# Altium PCB POT 2x8.PcbDoc
Units mm, origin at the board's own origin, x right, y up, seen from the top; angles counter-clockwise.
Board outline 81.6 x 56 mm, 4 copper layers (Top Layer, Mid Layer 1, Mid Layer 2, Bottom Layer), stack 0.97 mm thick; 87 components, 86 nets, 387 pads, 283 vias.
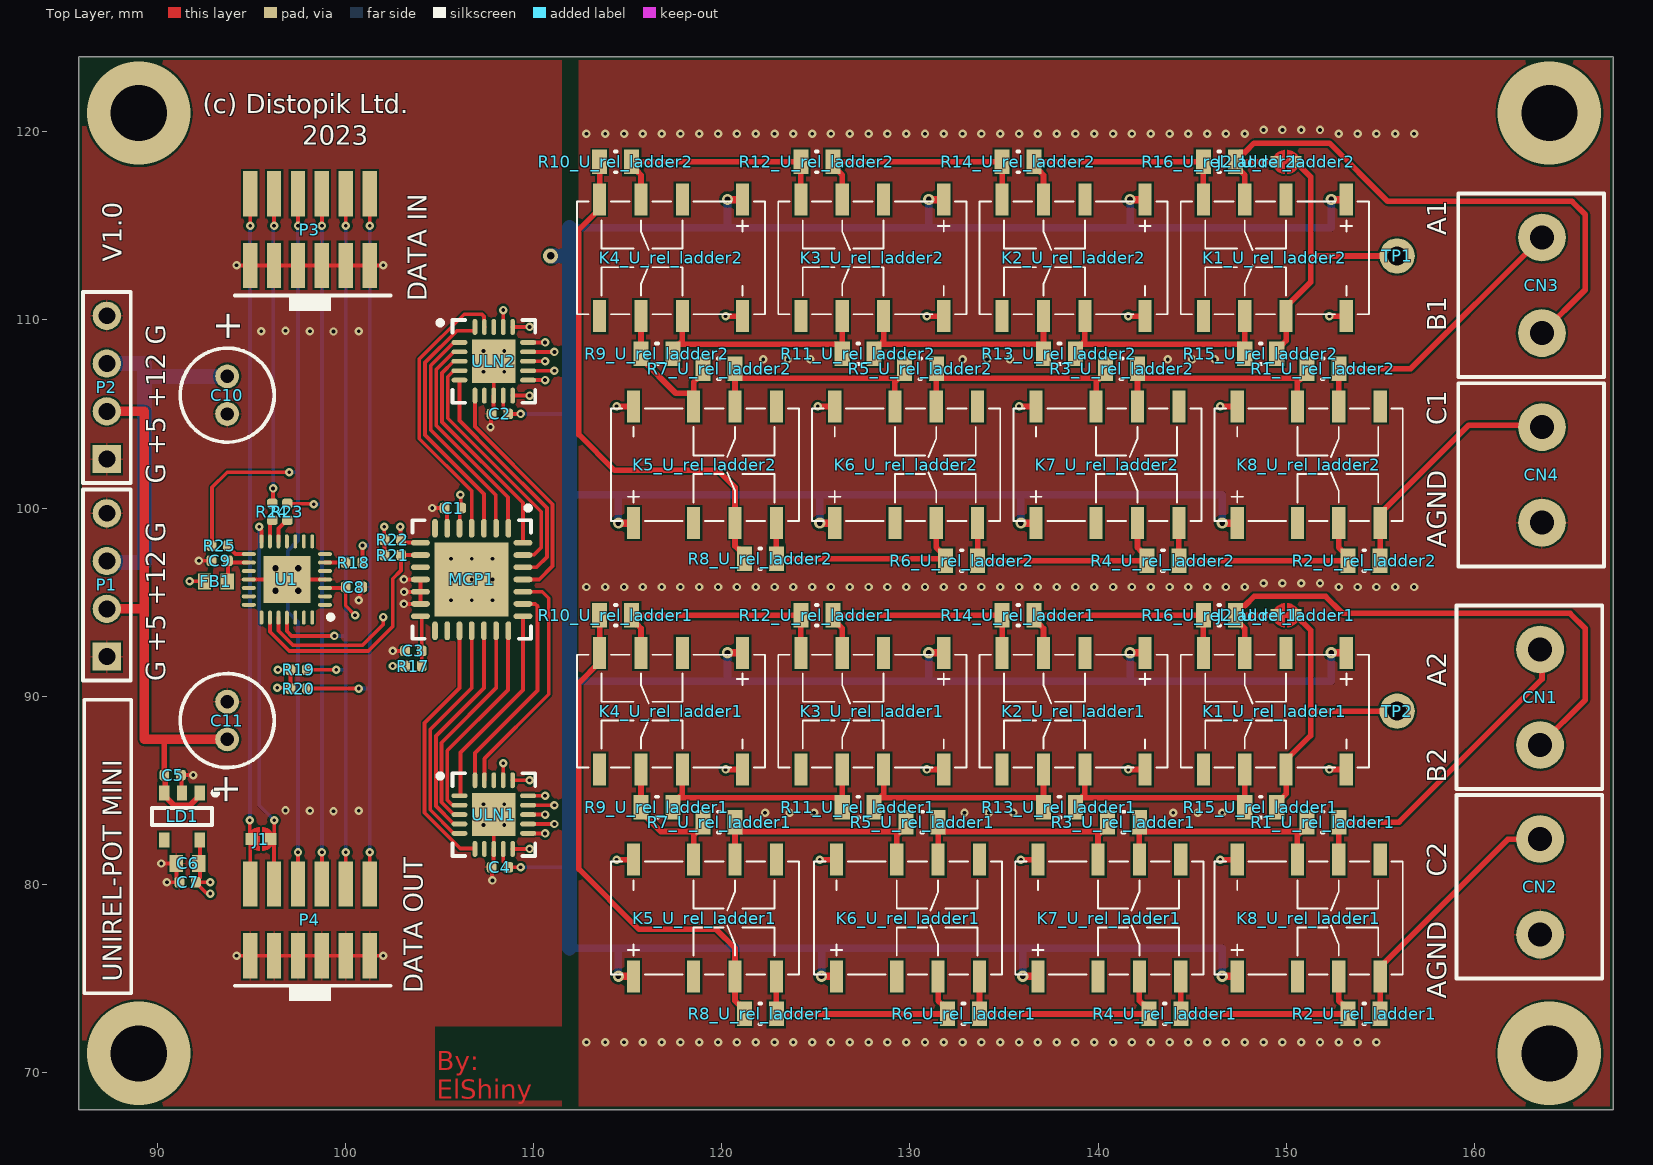
[diagram p0: Top Layer view]
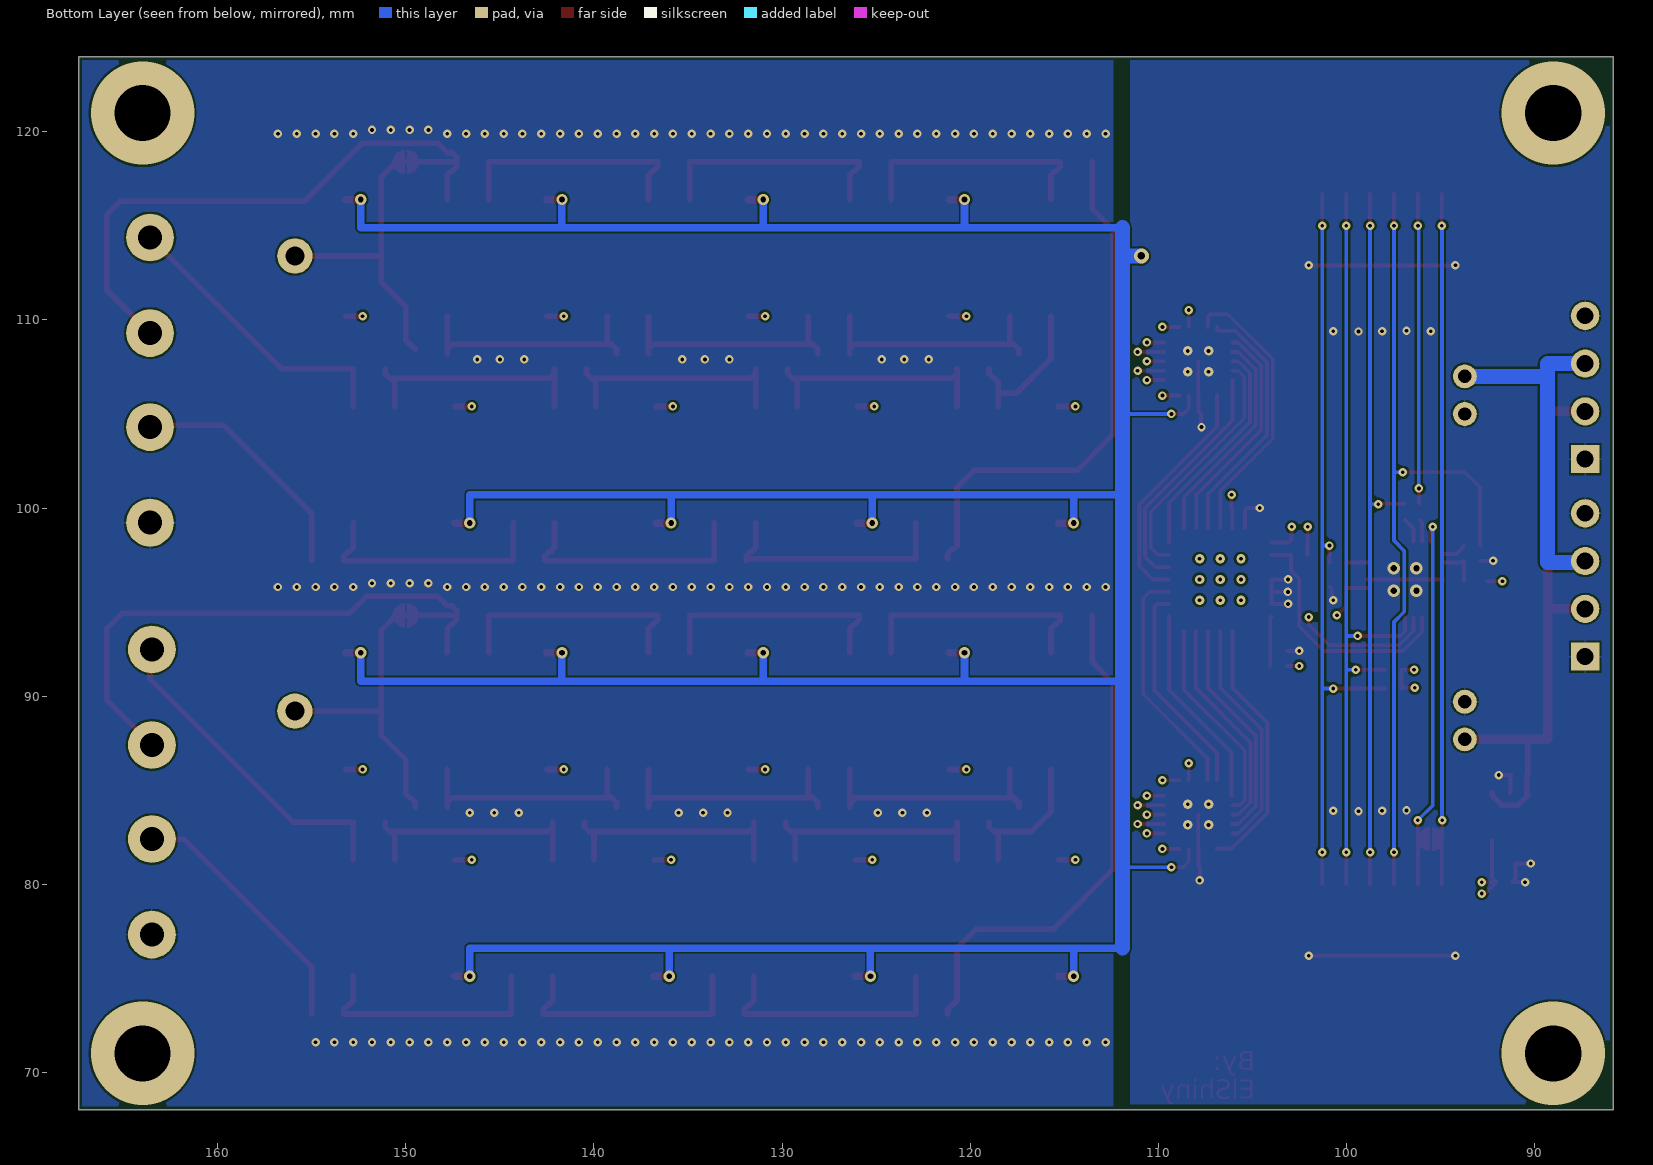
[diagram p1: Bottom Layer view, seen from below]
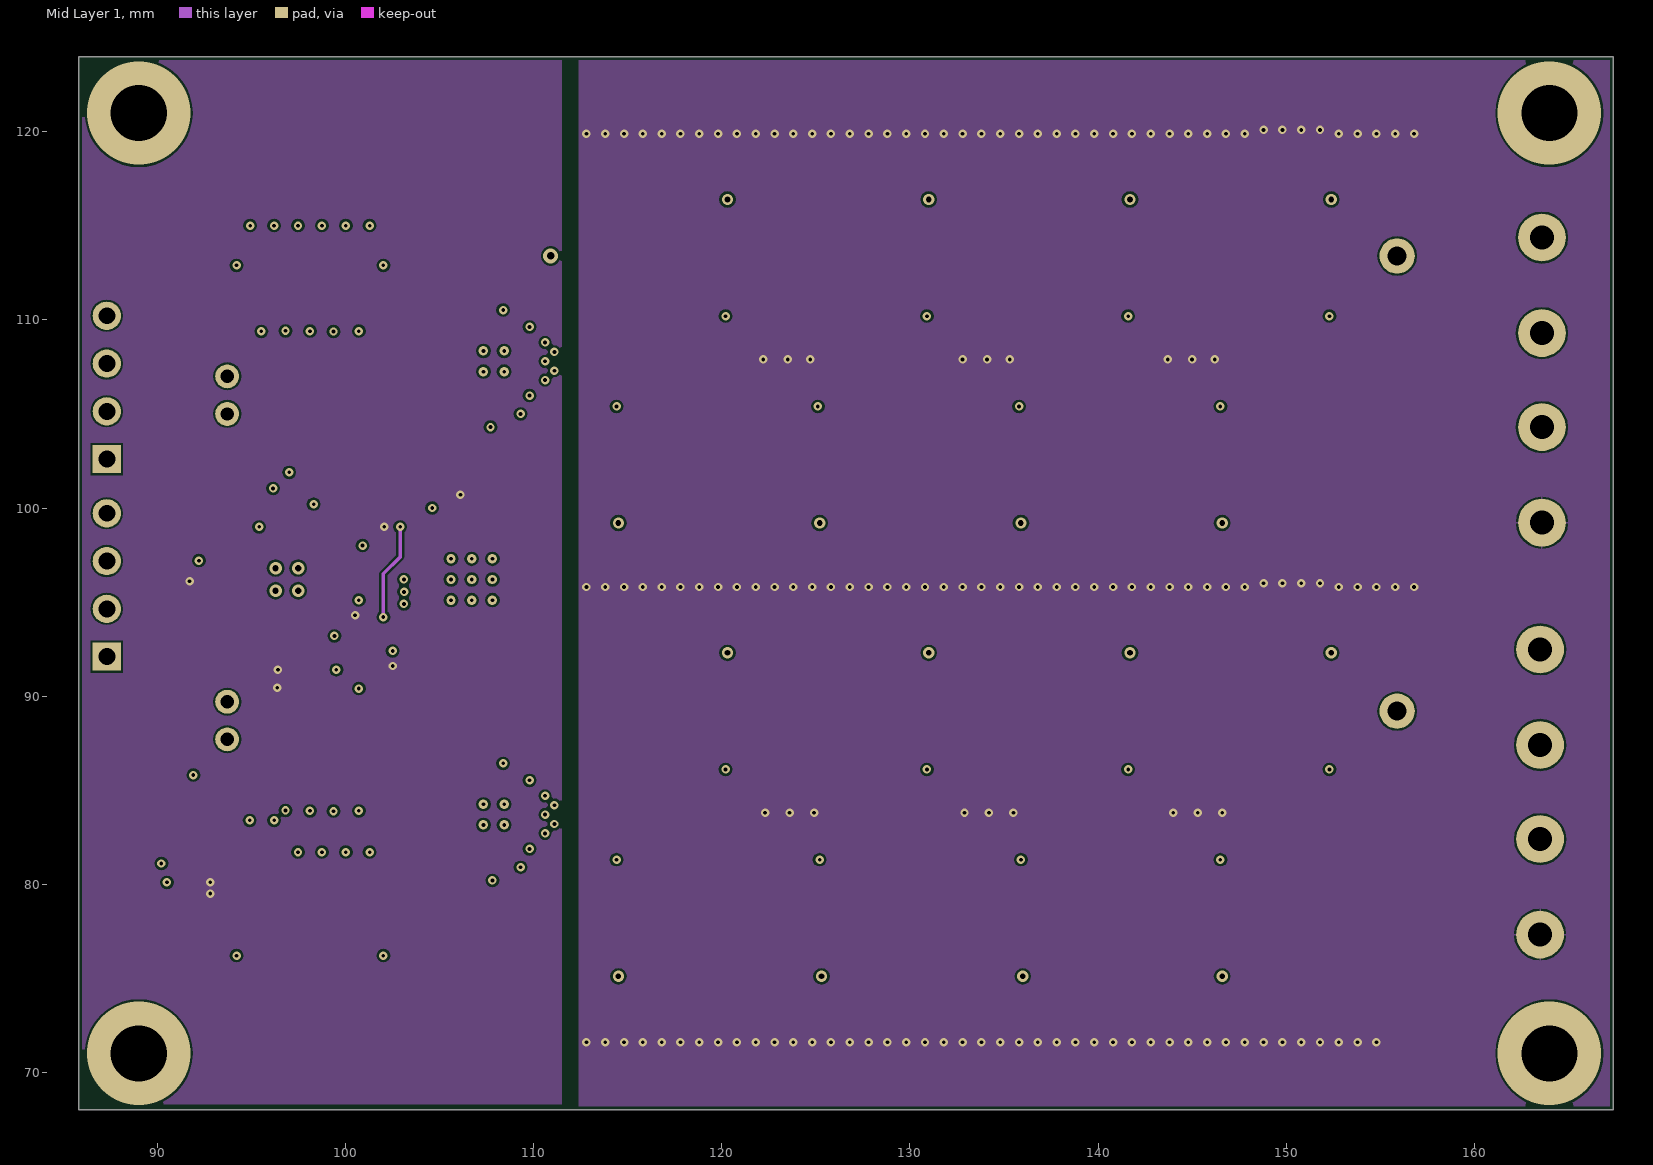
[diagram p2: Mid Layer 1]
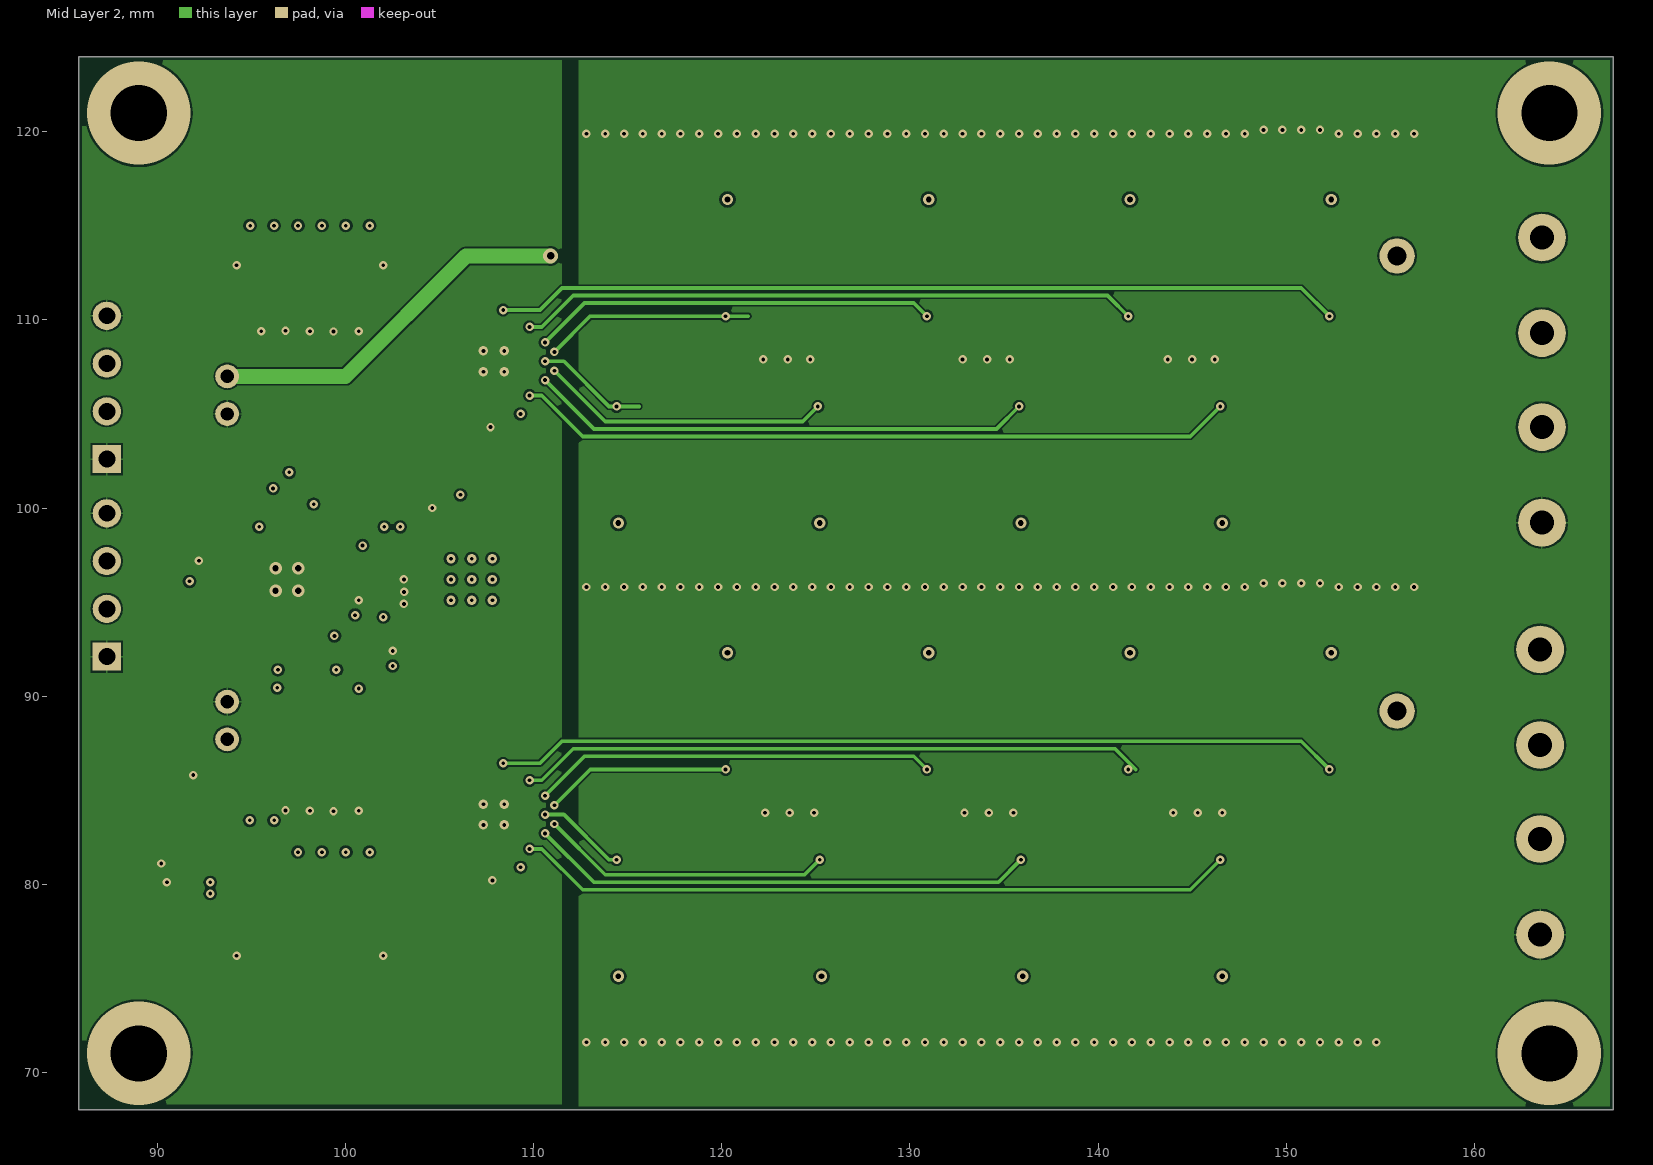
[diagram p3: Mid Layer 2]
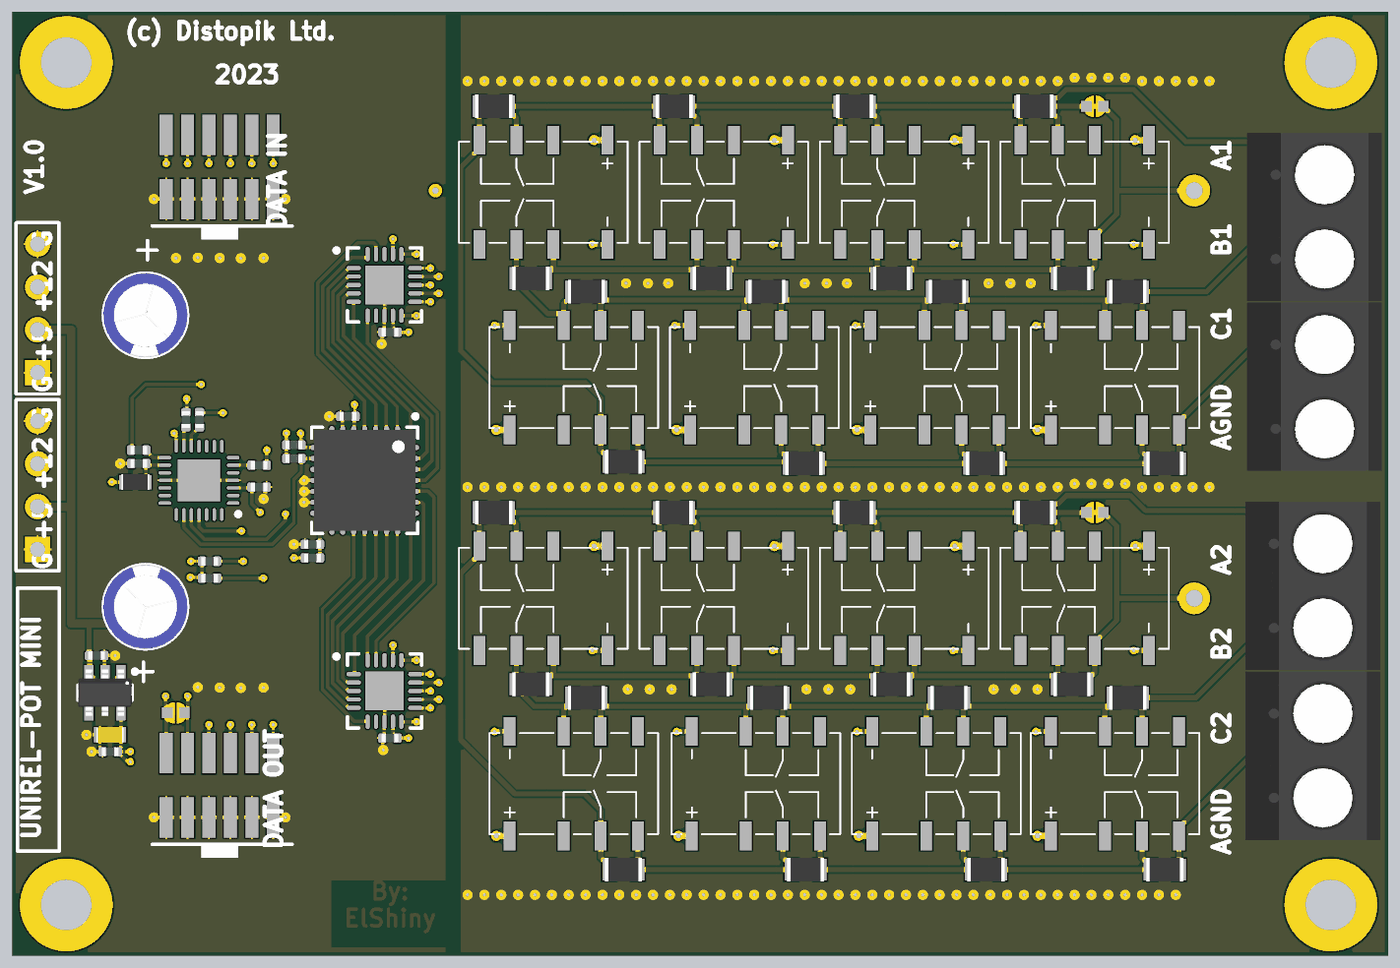
[diagram p4: 3D render of the assembled board from above, using the file's embedded part models]

## Layer stack, top to bottom
Top Solder: solder mask 0.0127, Solder Resist, Dk 3.8
Top Layer: signal copper 0.035
Dielectric 1: prepreg 0.2, 7628, Dk 4.6
Mid Layer 1: signal copper 0.0175
Core: core 0.465, FR-4, Dk 4.5
Mid Layer 2: signal copper 0.0175
Dielectric 2: prepreg 0.2, 7628, Dk 4.6
Bottom Layer: signal copper 0.035
Bottom Solder: solder mask 0.0127, Solder Resist, Dk 3.8

## Board outline
85.8,68 85.8,124 167.4,124 167.4,68

## Design rules (kind name [scope] priority, off if disabled: settings)
BoardOutlineClearance [All] p1: gap=0.2 ignorepadtopadclearanceinfootprint=FALSE
Clearance [All] p1: gap=0.102 ignorepadtopadclearanceinfootprint=FALSE except(0.127: Arc-Via Track-Via SMDPad-Via THPad-Via Via-Via Via-Fill Via-Poly Via-Region Via-Text; 0.25: Arc-Hole Track-Hole SMDPad-Hole THPad-Hole Via-Hole Fill-Hole Poly-Hole Region-Hole Text-Hole)
ComponentClearance [All] p1: gap=0.102 collisioncheckmode=3 verticalgap=0.102 showdistances=TRUE
DiffPairsRouting [All] p1: maxlimit=0.102 minlimit=0.102 mostfreqgap=0.102 toplayer_minwidth=0.102 toplayer_maxwidth=1816.048 toplayer_prefwidth=0.102 midlayer1_minwidth=0.102 midlayer1_maxwidth=1816.048 midlayer1_prefwidth=0.102 midlayer2_minwidth=0.102 midlayer2_maxwidth=1816.048 midlayer2_prefwidth=0.102 bottomlayer_minwidth=0.102 bottomlayer_maxwidth=1816.048 bottomlayer_prefwidth=0.102 maxuncoupledlength=12.7
Height [All] p1: minheight=0 maxheight=1816.048 prefheight=12.7
HoleSize [All] p1: absolutevalues=TRUE maxlimit=6.3 minlimit=0.2 maxpercent=80.000 minpercent=20.000
HoleToHoleClearance [All] p1: gap=0.25 allowstackedmicrovias=FALSE
MinimumAnnularRing [All] p1: minimumring=0.076
MinimumSolderMaskSliver [All] p1: minsoldermaskwidth=0
PlaneClearance [All] p1: clearance=0.102
PlaneConnect PlaneConnectPowerPads [InPadClass('PowerPads')] p1: planeconnectstyle=Direct reliefexpansion=0.508 reliefentries=4 reliefconductorwidth=0.254 reliefairgap=0.254
PlaneConnect [All] p2: pad.planeconnectstyle=Relief pad.reliefexpansion=0.3 pad.reliefentries=4 pad.reliefconductorwidth=0.102 pad.reliefairgap=0.102 via.planeconnectstyle=Direct via.reliefexpansion=0.3 via.reliefentries=4 via.reliefconductorwidth=0.127 via.reliefairgap=0.127
PolygonConnect PolygonConnectPowerPads [All vs (InPadClass('PowerPads'))] p1: connectstyle=Direct reliefconductorwidth=0.254 reliefentries=4 polygonreliefangle="90 Angle" airgapwidth=0.254
PolygonConnect [All] p2: thpad.connectstyle=Relief thpad.reliefconductorwidth=0.102 thpad.reliefentries=4 thpad.polygonreliefangle="90 Angle" thpad.airgapwidth=0.102 smdpad.connectstyle=Relief smdpad.reliefconductorwidth=0.102 smdpad.reliefentries=4 smdpad.polygonreliefangle="90 Angle" smdpad.airgapwidth=0.102 via.connectstyle=Direct via.reliefconductorwidth=0.127 via.reliefentries=4 via.polygonreliefangle="90 Angle" via.airgapwidth=0.127
RoutingVias [All] p1: holewidth=0.2 width=0.45 viastyle="Through Hole" minholewidth=0.2 minwidth=0.45 maxholewidth=6.3 maxwidth=6.55
SilkToSilkClearance [All] p1: silktosilkclearance=0
SilkToSolderMaskClearance [IsPad] p1: minsilkscreentomaskgap=0.102 clearancetoexposedcopper=TRUE
SolderMaskExpansion [All] p1: expansion=0.075 istentingtop=FALSE
Width [All] p1: maxlimit=1816.048 minlimit=0.102 preferedwidth=0.102
20 further rules are at their usual default settings.

## Classes and differential pairs
channel class rel_ladder: U_rel_ladder1 U_rel_ladder2
component class U_rel_ladder2: J2_U_rel_ladder1 K1_U_rel_ladder2 K2_U_rel_ladder2 K3_U_rel_ladder2 K4_U_rel_ladder1 K5_U_rel_ladder1 K6_U_rel_ladder1 K7_U_rel_ladder1 K8_U_rel_ladder1 R1_U_rel_ladder1 R2_U_rel_ladder1 R3_U_rel_ladder1 R4_U_rel_ladder1 R5_U_rel_ladder1 R6_U_rel_ladder1 R7_U_rel_ladder1 R8_U_rel_ladder1 R9_U_rel_ladder2 R10_U_rel_ladder2 R11_U_rel_ladder2 R12_U_rel_ladder2 R13_U_rel_ladder2 R14_U_rel_ladder2 R15_U_rel_ladder2 R16_U_rel_ladder1
component class U_rel_ladder1: J2_U_rel_ladder1 K1_U_rel_ladder2 K2_U_rel_ladder2 K3_U_rel_ladder2 K4_U_rel_ladder1 K5_U_rel_ladder1 K6_U_rel_ladder1 K7_U_rel_ladder1 K8_U_rel_ladder1 R1_U_rel_ladder1 R2_U_rel_ladder1 R3_U_rel_ladder1 R4_U_rel_ladder1 R5_U_rel_ladder1 R6_U_rel_ladder1 R7_U_rel_ladder1 R8_U_rel_ladder1 R9_U_rel_ladder2 R10_U_rel_ladder2 R11_U_rel_ladder2 R12_U_rel_ladder2 R13_U_rel_ladder2 R14_U_rel_ladder2 R15_U_rel_ladder2 R16_U_rel_ladder1
component class "POT 2x8": C1 C2 C3 C4 C5 C6 C7 C8 C9 C10 C11 CN1 CN2 CN3 CN4 FB1 J1 LD1 MCP1 P1 P2 P3 P4 R17 R18 R19 R20 R21 R22 R23 R24 R25 TP1 TP2 U1 ULN1 ULN2

## Components (designator, comment, footprint, x,y, rotation, side; value= is the part's Value field where it differs from the comment)
C1 "100n" R1005_0402i_L 105.7,100 r0 top
C2 "100n" R1005_0402i_L 108.2,105 r180 top
C3 "100n" R1005_0402i_L 103.6,92.4 r0 top
C4 "100n" R1005_0402i_L 108.2,80.9 r180 top
C5 "100n" R1005_0402i_L 90.8,85.8 r0 top
C6 "1u" C1608_0603I_L 91.6,81.1 r180 top
C7 "100n" R1005_0402i_L 91.6,80.1 r180 top
C8 "100n" R1005_0402i_L 100.44,95.8 r0 top
C9 "100n" R1005_0402i_L 93.3,97.2 r180 top
C10 "C+" "C AlElko 5x11 R2" 93.7,106 r90 top
C11 "C+" "C AlElko 5x11 R2" 93.7,88.7 r270 top
CN1 "VRSTNA SPONKA 2P/16A" "VRSTNA SPONKA 2P/16A" 163.5,92.48 r270 top
CN2 "VRSTNA SPONKA 2P/16A" "VRSTNA SPONKA 2P/16A" 163.5,82.4 r270 top
CN3 "VRSTNA SPONKA 2P/16A" "VRSTNA SPONKA 2P/16A" 163.6,114.38 r270 top
CN4 "VRSTNA SPONKA 2P/16A" "VRSTNA SPONKA 2P/16A" 163.6,104.3 r270 top
FB1 "FERITTE BEAD" R1608_0603I_L 93.1,96.1 r0 top
J1 "Terminator" solderJumper 95.5,82.4 r0 top
J2_U_rel_ladder1 "JMP_mini" solderJumper 150,94.3 r180 top (schematic designator J2)
J2_U_rel_ladder2 "JMP_mini" solderJumper 150,118.4 r180 top (schematic designator J2)
K1_U_rel_ladder1 "DPDT" "AXICOM IM-G Relay" 149.4,89.2 r180 top (schematic designator K1)
K1_U_rel_ladder2 "DPDT" "AXICOM IM-G Relay" 149.4,113.3 r180 top (schematic designator K1)
K2_U_rel_ladder1 "DPDT" "AXICOM IM-G Relay" 138.7,89.2 r180 top (schematic designator K2)
K2_U_rel_ladder2 "DPDT" "AXICOM IM-G Relay" 138.7,113.3 r180 top (schematic designator K2)
K3_U_rel_ladder1 "DPDT" "AXICOM IM-G Relay" 128,89.2 r180 top (schematic designator K3)
K3_U_rel_ladder2 "DPDT" "AXICOM IM-G Relay" 128,113.3 r180 top (schematic designator K3)
K4_U_rel_ladder1 "DPDT" "AXICOM IM-G Relay" 117.3,89.2 r180 top (schematic designator K4)
K4_U_rel_ladder2 "DPDT" "AXICOM IM-G Relay" 117.3,113.3 r180 top (schematic designator K4)
K5_U_rel_ladder1 "DPDT" "AXICOM IM-G Relay" 119.1,78.2 r0 top (schematic designator K5)
K5_U_rel_ladder2 "DPDT" "AXICOM IM-G Relay" 119.1,102.3 r0 top (schematic designator K5)
K6_U_rel_ladder1 "DPDT" "AXICOM IM-G Relay" 129.9,78.2 r0 top (schematic designator K6)
K6_U_rel_ladder2 "DPDT" "AXICOM IM-G Relay" 129.8,102.3 r0 top (schematic designator K6)
K7_U_rel_ladder1 "DPDT" "AXICOM IM-G Relay" 140.6,78.2 r0 top (schematic designator K7)
K7_U_rel_ladder2 "DPDT" "AXICOM IM-G Relay" 140.5,102.3 r0 top (schematic designator K7)
K8_U_rel_ladder1 "DPDT" "AXICOM IM-G Relay" 151.2,78.2 r0 top (schematic designator K8)
K8_U_rel_ladder2 "DPDT" "AXICOM IM-G Relay" 151.2,102.3 r0 top (schematic designator K8)
LD1 "NCP115 3.3V" TSOP95P280X110-6L 91.3,83.6 r270 top
MCP1 "MCP32017" "MCP23017 QFN" 106.7,96.2 r270 top locked
P1 "PWR" HDR1X4 87.3,92.1 r90 top
P2 "PWR" HDR1X4 87.3,102.6 r90 top
P3 "Input" "1.27mm SMD conn" 98.1,114.8 r180 top
P4 "Output" "1.27mm SMD conn" 98.1,78.1 r180 top
R1_U_rel_ladder1 "R/2" R2012_0805I_L 151.95,83.3 r180 top (schematic designator R1)
R1_U_rel_ladder2 "R/2" R2012_0805I_L 151.95,107.4 r180 top (schematic designator R1)
R2_U_rel_ladder1 "R/2" R2012_0805I_L 154.15,73.1 r180 top (schematic designator R2)
R2_U_rel_ladder2 "R/2" R2012_0805I_L 154.15,97.2 r180 top (schematic designator R2)
R3_U_rel_ladder1 "R/4" R2012_0805I_L 141.35,83.3 r180 top (schematic designator R3)
R3_U_rel_ladder2 "R/4" R2012_0805I_L 141.25,107.4 r180 top (schematic designator R3)
R4_U_rel_ladder1 "R/4" R2012_0805I_L 143.55,73.1 r180 top (schematic designator R4)
R4_U_rel_ladder2 "R/4" R2012_0805I_L 143.45,97.2 r180 top (schematic designator R4)
R5_U_rel_ladder1 "R/8" R2012_0805I_L 130.65,83.3 r180 top (schematic designator R5)
R5_U_rel_ladder2 "R/8" R2012_0805I_L 130.55,107.4 r180 top (schematic designator R5)
R6_U_rel_ladder1 "R/8" R2012_0805I_L 132.85,73.1 r180 top (schematic designator R6)
R6_U_rel_ladder2 "R/8" R2012_0805I_L 132.75,97.2 r180 top (schematic designator R6)
R7_U_rel_ladder1 "R/16" R2012_0805I_L 119.85,83.3 r180 top (schematic designator R7)
R7_U_rel_ladder2 "R/16" R2012_0805I_L 119.85,107.4 r180 top (schematic designator R7)
R8_U_rel_ladder1 "R/16" R2012_0805I_L 122.05,73.1 r180 top (schematic designator R8)
R8_U_rel_ladder2 "R/16" R2012_0805I_L 122.05,97.3 r180 top (schematic designator R8)
R9_U_rel_ladder1 "R/32" R2012_0805I_L 116.55,84.1 r0 top (schematic designator R9)
R9_U_rel_ladder2 "R/32" R2012_0805I_L 116.55,108.2 r0 top (schematic designator R9)
R10_U_rel_ladder1 "R/32" R2012_0805I_L 114.35,94.3 r0 top (schematic designator R10)
R10_U_rel_ladder2 "R/32" R2012_0805I_L 114.35,118.4 r0 top (schematic designator R10)
R11_U_rel_ladder1 "R/64" R2012_0805I_L 127.25,84.1 r0 top (schematic designator R11)
R11_U_rel_ladder2 "R/64" R2012_0805I_L 127.25,108.2 r0 top (schematic designator R11)
R12_U_rel_ladder1 "R/64" R2012_0805I_L 125.05,94.3 r0 top (schematic designator R12)
R12_U_rel_ladder2 "R/64" R2012_0805I_L 125.05,118.4 r0 top (schematic designator R12)
R13_U_rel_ladder1 "R/128" R2012_0805I_L 137.95,84.1 r0 top (schematic designator R13)
R13_U_rel_ladder2 "R/128" R2012_0805I_L 137.95,108.2 r0 top (schematic designator R13)
R14_U_rel_ladder1 "R/128" R2012_0805I_L 135.75,94.3 r0 top (schematic designator R14)
R14_U_rel_ladder2 "R/128" R2012_0805I_L 135.75,118.4 r0 top (schematic designator R14)
R15_U_rel_ladder1 "R/256" R2012_0805I_L 148.65,84.1 r0 top (schematic designator R15)
R15_U_rel_ladder2 "R/256" R2012_0805I_L 148.65,108.2 r0 top (schematic designator R15)
R16_U_rel_ladder1 "R/256" R2012_0805I_L 146.45,94.3 r0 top (schematic designator R16)
R16_U_rel_ladder2 "R/256" R2012_0805I_L 146.45,118.4 r0 top (schematic designator R16)
R17 "100k" R1005_0402i_L 103.6,91.6 r0 top
R18 "500" R1005_0402i_L 100.44,97.1 r180 top
R19 "100k" R1005_0402i_L 97.5,91.4 r0 top
R20 "100k" R1005_0402i_L 97.5,90.4 r0 top
R21 "10k" R1005_0402i_L 102.5,97.5 r0 top
R22 "10k" R1005_0402i_L 102.5,98.3 r0 top
R23 "500" R1005_0402i_L 96.9,99.8 r270 top
R24 "500" R1005_0402i_L 96.1,99.8 r270 top
R25 "500" R1005_0402i_L 93.3,98 r0 top
TP1 "PAD" PAD_CIRC_HOLE 155.9,113.4 r90 top
TP2 "PAD" PAD_CIRC_HOLE 155.9,89.2 r90 top
U1 "ATtiny88-MMU" 28M1_N 96.875,96.2 r180 top
ULN1 "ULN2803" QFN127P600-8N 107.875,83.7 r0 top
ULN2 "ULN2803" QFN127P600-8N 107.875,107.8 r0 top

## Footprints (in the part's own frame and the unit in brackets; to place one, negate y for a bottom-side part, rotate by r counter-clockwise, add the part's x,y. Pads: shape width x height; smd on the part's side, far side on the other; paste and mask are expansions set on the pad)
"1.27mm SMD conn" [mm]
  rect 0.76x2.4 smd: 1(3.175,1.905) 2(3.175,-1.905) 3(1.905,1.905) 4(1.905,-1.905) 5(0.635,1.905) 6(0.635,-1.905) 7(-0.635,1.905) 8(-0.635,-1.905) 9(-1.905,1.905) 10(-1.905,-1.905) 11(-3.175,1.905) 12(-3.175,-1.905)
28M1_N [mm]
  oval 0.75x0.2 smd: 1(-2.025,1.35) 2(-2.025,0.9) 3(-2.025,0.45) 4(-2.025,0) 5(-2.025,-0.45) 6(-2.025,-0.9) 7(-2.025,-1.35) 15(2.025,-1.35) 16(2.025,-0.9) 17(2.025,-0.45) 18(2.025,0) 19(2.025,0.45) 20(2.025,0.9) 21(2.025,1.35)
  oval 0.2x0.75 smd: 8(-1.35,-2.025) 9(-0.9,-2.025) 10(-0.45,-2.025) 11(0,-2.025) 12(0.45,-2.025) 13(0.9,-2.025) 14(1.35,-2.025) 22(1.35,2.025) 23(0.9,2.025) 24(0.45,2.025) 25(0,2.025) 26(-0.45,2.025) 27(-0.9,2.025) 28(-1.35,2.025)
  rect 2.5x2.5 smd: 29(0,0)
  silkscreen extent -2.45,1.88 -2.2,2.12, body extent -2.03,-2.02 2.02,2.03, height 1
"AXICOM IM-G Relay" [mm] "TE CONNECTIVITY AXICOM IM-G (Gull wings) Relay SMD"
  rect 0.7x1.7 smd: 1(-3.8,-3.1) 2(-0.6,-3.1) 3(1.6,-3.1) 4(3.8,-3.1) 5(3.8,3.1) 6(1.6,3.1) 7(-0.6,3.1) 8(-3.8,3.1)
  silkscreen extent -5,-3 5,3
C1608_0603I_L [mm] "Chip Capacitor, 2-Leads, Body 1.57x0.85mm, IPC High Density"
  rect 0.72x0.9 smd: 1(-0.6,0) 2(0.6,0)
  body extent -0.82,-0.48 0.82,0.48, height 0.95
"C AlElko 5x11 R2" [mm]
  round 1.27 hole 0.711: 1(1,0) 2(-1,0)
  silkscreen extent -2.5,-2.5 2.5,2.5, body extent -2.5,-2.5 2.5,2.5, height 11.01
HDR1X4 [mm] "Connector; Header; 4 Position"
  rect 1.5x1.5 hole 0.9: 1(0,0)
  round 1.5 hole 0.9: 2(2.54,0) 3(5.08,0) 4(7.62,0)
  silkscreen extent -1.27,-1.27 8.89,1.27
"MCP23017 QFN" [mm] "QFN, 28-Leads, Body 6,00x6,00mm, Pitch 0,65mm, Thermal Pad 3,93x3,93mm, IPC High Density"
  oval 1x0.3 smd: 1(-2.725,1.95) 2(-2.725,1.3) 3(-2.725,0.65) 4(-2.725,0) 5(-2.725,-0.65) 6(-2.725,-1.3) 7(-2.725,-1.95) 15(2.725,-1.95) 16(2.725,-1.3) 17(2.725,-0.65) 18(2.725,0) 19(2.725,0.65) 20(2.725,1.3) 21(2.725,1.95)
  oval 0.3x1 smd: 8(-1.95,-2.725) 9(-1.3,-2.725) 10(-0.65,-2.725) 11(0,-2.725) 12(0.65,-2.725) 13(1.3,-2.725) 14(1.95,-2.725) 22(1.95,2.725) 23(1.3,2.725) 24(0.65,2.725) 25(0,2.725) 26(-0.65,2.725) 27(-1.3,2.725) 28(-1.95,2.725)
  rect 3.93x3.93 smd: 29(0,0)
  silkscreen extent -3.92,-3.15 3.15,3.15, body extent -3,-3 3,3, height 0.9
PAD_CIRC_HOLE [mil]
  round 74 hole 39.4: 1(0,0)
QFN127P600-8N [mm]
  oval 0.85x0.25 smd: 1(-1.825,1) 2(-1.825,0.5) 3(-1.825,0) 4(-1.825,-0.5) 5(-1.825,-1) 11(1.825,-1) 12(1.825,-0.5) 13(1.825,0) 14(1.825,0.5) 15(1.825,1)
  oval 0.25x0.85 smd: 6(-1,-1.825) 7(-0.5,-1.825) 8(0,-1.825) 9(0.5,-1.825) 10(1,-1.825) 16(1,1.825) 17(0.5,1.825) 18(0,1.825) 19(-0.5,1.825) 20(-1,1.825)
  rect 2.3x2.3 smd: 21(0,0)
  silkscreen extent -2.97,-2.2 2.2,2.2, body extent -2.05,-2.05 2.05,2.05, height 0.8
R1005_0402i_L [mm] "Resistor, Chip; 1.00 mm L X 0.50 mm W X 0.40 mm H body"
  rrect50% 0.52x0.56 smd: 1(-0.44,0) 2(0.44,0)
  body extent -0.5,-0.25 0.5,0.25, height 0.4
R1608_0603I_L [mm] "Chip Resistor, 2-Leads, Body 1.57x0.85mm, IPC High Density"
  rect 0.7x0.85 smd: 1(-0.6,0) 2(0.6,0)
  body extent -0.82,-0.48 0.82,0.48, height 0.5
R2012_0805I_L [mm] "Chip Resistor, 2-Leads, Body 2.05x1.25mm, IPC High Density"
  rect 0.8x1.3 smd: 1(-0.85,0) 2(0.85,0)
  silkscreen extent -0.05,-0.55 0.05,0.55, body extent -1.1,-0.7 1.1,0.7, height 0.8
solderJumper [mil]
  rect 25x25 smd: 1(20,0) 2(-20,0)
  Top Layer region: 2.51,25 12.08,23.1 20.19,17.68 25.61,9.57 27.51,0 27.51,0 25.61,-9.57 20.19,-17.68 12.08,-23.1 2.51,-25 2.51,-25
  Top Layer region: -2.51,25 -12.08,23.1 -20.19,17.68 -25.61,9.57 -27.51,0 -27.51,0 -25.61,-9.57 -20.19,-17.68 -12.08,-23.1 -2.51,-25 -2.51,-25
TSOP95P280X110-6L [mm]
  rect 0.8x0.55 smd: 1(-1.25,0.95) 2(-1.25,0) 3(-1.25,-0.95) 4(1.25,-0.95) 5(1.25,0.95)
  silkscreen extent -1.37,-1.6 0.45,1.9, body extent -1.38,-1.6 1.38,1.6, height 1.1
"VRSTNA SPONKA 2P/16A" [mm]
  round 2.54 hole 1.27: 1(0,0) 2(5.08,0)
  silkscreen extent -2.34,-4.44 7.42,3.3, body extent -2.46,-4.57 7.54,3.43, height 10.01

## Part data
C1 C2 C3 C4 C5 C6 C7 C8 C9: library part C, "Capacitor"
C10 C11: "Capacitor Polarized"
J1: library part JMP_mini
K1_U_rel_ladder1 K1_U_rel_ladder2 K2_U_rel_ladder1 K2_U_rel_ladder2 K3_U_rel_ladder1 K3_U_rel_ladder2 K4_U_rel_ladder1 K4_U_rel_ladder2 K5_U_rel_ladder1 K5_U_rel_ladder2 K6_U_rel_ladder1 K6_U_rel_ladder2 K7_U_rel_ladder1 K7_U_rel_ladder2 K8_U_rel_ladder1 K8_U_rel_ladder2: library part "IM-GR Relay DPDT", "TE CONNECTIVITY  IM-GR  RELAY, DPDT, NO", Farnell ID=1175070, URL=http://si.farnell.com/te-connectivity-axicom/im06gr/relay-gull-wing-dpco-12vdc-2a/dp/1175070
P1 P2: library part "Header 4", "Header, 4-Pin", LatestRevisionDate=17-Jul-2002, LatestRevisionNote="Re-released for DXP Platform.", Publisher="Altium Limited"
P3 P4: library part "Header 6X2", "Header, 6-Pin, Dual row", LatestRevisionDate=17-Jul-2002, LatestRevisionNote="Re-released for DXP Platform.", Publisher="Altium Limited"
R1_U_rel_ladder1 R1_U_rel_ladder2 R2_U_rel_ladder1 R2_U_rel_ladder2 R3_U_rel_ladder1 R3_U_rel_ladder2 R4_U_rel_ladder1 R4_U_rel_ladder2 R5_U_rel_ladder1 R5_U_rel_ladder2 R6_U_rel_ladder1 R6_U_rel_ladder2 R7_U_rel_ladder1 R7_U_rel_ladder2 R8_U_rel_ladder1 R8_U_rel_ladder2 R9_U_rel_ladder1 R9_U_rel_ladder2 R10_U_rel_ladder1 R10_U_rel_ladder2 R11_U_rel_ladder1 R11_U_rel_ladder2 R12_U_rel_ladder1 R12_U_rel_ladder2 R13_U_rel_ladder1 R13_U_rel_ladder2 R14_U_rel_ladder1 R14_U_rel_ladder2 R15_U_rel_ladder1 R15_U_rel_ladder2 R16_U_rel_ladder1 R16_U_rel_ladder2 R17 R18 R19 R20 R21 R22 R23 R24 R25: library part R, "R"
U1: "8-bit AVR Microcontroller, 1.8-5.5V, 8KB Flash, 64 Bytes EEPROM, 512 Bytes SRAM, 28-pin MLF, Industrial Grade (-40°C to 85°C), Pb-Free", Supplier Part Number 1=ATTINY88-MMU-ND, ComponentLink1Description="Manufacturer Link", ComponentLink1URL=http://www.atmel.com/products/avr/default.asp?, ComponentLink2Description="ATtiny48/88 Datasheet", ComponentLink2URL=http://www.atmel.com/dyn/resources/prod_documents/doc8008.pdf, ComponentLink3Description="ATtiny48/88 Summary", ComponentLink3URL=http://www.atmel.com/dyn/resources/prod_documents/8008S.pdf, ComponentLink4Description="Atmel.com Home", ComponentLink4URL=http://www.atmel.com, DatasheetVersion="revC, Mar-2009", PackageDescription="28-pad, 4x4x1.0mm Body, Pitch 0.45mm, 2.4x2.4mm Exposed Pad, Plastic Very Thin QFN Package (VQFN)", PackageReference=28M1, PackageVersion="revB, Nov-2008", Published=1-Apr-2010, Publisher="Altium Limited", Supplier 1=Digi-Key, Supplier 2=Mouser, Supplier Part Number 2=556-ATTINY88-MMU

## Via types
v1: diameter 0.45, hole 0.2, Top Layer to Bottom Layer, 241 vias
v2: diameter 0.5, hole 0.2, Top Layer to Bottom Layer, 17 vias
v3: diameter 0.6, hole 0.3, Top Layer to Bottom Layer, 16 vias
v4: diameter 5.5, hole 3, Top Layer to Bottom Layer, 4 vias
v5: diameter 0.66, hole 0.33, Top Layer to Bottom Layer, 4 vias
v6: diameter 0.8, hole 0.4, Top Layer to Bottom Layer, 1 vias

## Nets (pads, with @x,y where several pads share a name; then routed paths per layer and width w, separated by ;. In a path a pad name is that pad's centre, name@x,y a point inside that pad or via, vN(x,y) a via of type N, cw(c..) or ccw(c..) an arc to the next point about the centre after c; other vN are vias at no path point)
+3.3V: C1.2 C6.1 C7.1 C8.1 FB1.1 LD1.5 MCP1.5 R17.1 R19.1 R20.1 R21.1 R22.1 U1.3 | length 14.1
  Top Layer w0.2: v1(91.7,96.1) FB1.1 ; LD1.5 92.25,80.346 92.04,80.136 C7.1 ; v1(92.8,79.5) 92.752,79.548 92.572,79.548 92.04,80.08 C7.1 ; v1(92.8,80.1) C7.1 ; v1(96.363,90.439) 97.021,90.439 R20.1 R19.1 v1(96.4,91.4) ; U1.3 C8.1@100,95.75 ; C8.1 C8.1@100,95.75 ; v1(100.5,94.3) 100,94.8 C8.1@100,95.75 ; v1(102.051,98.998) 102.056,98.993 102.056,98.304 R22.1 R21.1 ; v1(102.5,91.6) R17.1 ; MCP1.5 106.069,98.944 106.069,99.929 C1.2 106.12,100.02 106.12,100.68 v1(106.1,100.7)
+5: C5.1 C11.1 LD1.1 LD1.3 P1.2 P2.2 | length 30.9
  Top Layer w0.3: 90.3,87.7 90.36,87.7 C5.1 ; C5.1@90.4,85.8 90.4,84.85 LD1.3 90.35,84.725 90.877,84.198 91.723,84.198 92.25,84.725 LD1.1
  Top Layer w0.5: P1.2 89.3,94.64 ; P2.2 89.3,105.14 89.3,94.64 ; 90.3,87.7 89.3,87.7 89.3,94.64 ; 90.36,87.7 C11.1@93.3,87.7
+12: C2.1 C4.1 C10.1 K1_U_rel_ladder1.1 K1_U_rel_ladder2.1 K2_U_rel_ladder1.1 K2_U_rel_ladder2.1 K3_U_rel_ladder1.1 K3_U_rel_ladder2.1 K4_U_rel_ladder1.1 K4_U_rel_ladder2.1 K5_U_rel_ladder1.1 K5_U_rel_ladder2.1 K6_U_rel_ladder1.1 K6_U_rel_ladder2.1 K7_U_rel_ladder1.1 K7_U_rel_ladder2.1 K8_U_rel_ladder1.1 K8_U_rel_ladder2.1 P1.3 P2.3 ULN1.9 ULN2.9 | length 274.4
  Top Layer w0.2: ULN1.9 108.375,81.195 108.64,80.93 C4.1 v1(109.3,80.9) ; ULN2.9 108.375,105.295 108.64,105.03 C2.1 v1(109.3,105)
  Top Layer w0.4: v3(114.5,75.1) K5_U_rel_ladder1.1 ; v3(114.5,99.2) K5_U_rel_ladder2.1 ; v3(120.3,92.3) K4_U_rel_ladder1.1 ; v3(120.3,116.4) K4_U_rel_ladder2.1 ; v3(125.2,99.2) K6_U_rel_ladder2.1 ; v3(125.3,75.1) K6_U_rel_ladder1.1 ; v3(131,92.3) K3_U_rel_ladder1.1 ; v3(131,116.4) K3_U_rel_ladder2.1 ; v3(135.9,99.2) K7_U_rel_ladder2.1 ; v3(136,75.1) K7_U_rel_ladder1.1 ; v3(141.7,92.3) K2_U_rel_ladder1.1 ; v3(141.7,116.4) K2_U_rel_ladder2.1 ; v3(146.6,75.1) K8_U_rel_ladder1.1 ; v3(146.6,99.2) K8_U_rel_ladder2.1 ; v3(152.4,92.3) K1_U_rel_ladder1.1 ; v3(152.4,116.4) K1_U_rel_ladder2.1
  Mid Layer 2 w0.8: C10.1 100,107 106.4,113.4 v6(110.9,113.4)
  Bottom Layer w0.2: v1(109.3,80.9) 111.9,80.9 111.9,80.8 ; v1(109.3,105) 111.9,105
  Bottom Layer w0.4: 111.9,76.6 114.5,76.6 ; 111.9,90.8 120.3,90.8 ; 111.9,100.7 114.5,100.7 ; 111.9,114.9 120.3,114.9 ; v3@114.5,75.136 114.5,76.6 ; v3@114.5,99.138 114.5,100.7 ; v3@120.3,92.392 120.3,90.8 ; v3@120.3,116.423 120.3,114.9 ; v3@125.2,99.113 125.2,100.7 ; v3@125.3,75.159 125.3,76.6 ; v3@131,92.326 131,90.8 ; v3@131,116.406 131,114.9 ; v3@135.9,99.201 135.9,100.7 ; v3@136,75.022 136,76.6 ; v3@141.7,92.323 141.7,90.8 ; v3@141.7,116.413 141.7,114.9 ; v3(146.6,75.1) 146.6,76.6 136.3,76.6 136,76.6 ; v3(146.6,99.2) 146.6,100.7 136.3,100.7 135.9,100.7 ; v3(152.4,92.3) 152.4,90.8 141.7,90.8 ; v3(152.4,116.4) 152.4,114.9 141.7,114.9 ; 114.5,76.6 125.3,76.6 ; 114.5,100.7 125.2,100.7 ; 120.3,90.8 131,90.8 ; 120.3,114.9 131,114.9 ; 125.2,100.7 135.9,100.7 ; 125.3,76.6 136,76.6 ; 131,90.8 141.7,90.8 ; 131,114.9 141.7,114.9
  Bottom Layer w0.8: P1.3 87.3,97.1 89.3,97.1 89.3,107 ; P2.3 89.3,107.68 89.3,107 ; C10.1 89.3,107 ; v6(110.9,113.4) 111.9,113.4 ; 111.9,76.6 111.9,80.8 ; 111.9,80.9 111.9,90.8 111.9,100.7 111.9,105 111.9,113.4 ; 111.9,114.9 111.9,113.4
A1: CN3.1 K8_U_rel_ladder2.6 R1_U_rel_ladder2.1 | length 15.7
  Top Layer w0.3: K8_U_rel_ladder2.6 R1_U_rel_ladder2.1 156.62,107.4 CN3.1
A2: CN1.1 K8_U_rel_ladder1.6 R1_U_rel_ladder1.1 | length 16.5
  Top Layer w0.3: K8_U_rel_ladder1.6 R1_U_rel_ladder1.1 156,83.3 163.6,90.9 CN1.1@163.6,91.48
AGND: CN2.2 CN4.2
  other v1: 112.8,71.6 113.8,71.6 114.8,71.6 115.8,71.6 116.8,71.6 117.8,71.6 118.8,71.6 119.8,71.6 120.8,71.6 121.8,71.6 122.8,71.6 123.8,71.6 124.8,71.6 125.8,71.6 126.8,71.6 127.8,71.6 128.8,71.6 129.8,71.6 130.8,71.6 131.8,71.6 132.8,71.6 133.8,71.6 134.8,71.6 135.8,71.6 136.8,71.6 137.8,71.6 138.8,71.6 139.8,71.6 140.8,71.6 141.8,71.6 142.8,71.6 143.8,71.6 144.8,71.6 145.8,71.6 146.8,71.6 147.8,71.6 148.8,71.6 149.8,71.6 150.8,71.6 151.8,71.6 152.8,71.6 153.8,71.6 154.8,71.6 122.3,83.8 123.6,83.8 124.9,83.8 132.9,83.8 134.2,83.8 135.5,83.8 144,83.8 145.3,83.8 146.6,83.8 112.8,95.8 113.8,95.8 114.8,95.8 115.8,95.8 116.8,95.8 117.8,95.8 118.8,95.8 119.8,95.8 120.8,95.8 121.8,95.8 122.8,95.8 123.8,95.8 124.8,95.8 125.8,95.8 126.8,95.8 127.8,95.8 128.8,95.8 129.8,95.8 130.8,95.8 131.8,95.8 132.8,95.8 133.8,95.8 134.8,95.8 135.8,95.8 136.8,95.8 137.8,95.8 138.8,95.8 139.8,95.8 140.8,95.8 141.8,95.8 142.8,95.8 143.8,95.8 144.8,95.8 145.8,95.8 146.8,95.8 147.8,95.8 152.8,95.8 153.8,95.8 154.8,95.8 155.8,95.8 156.8,95.8 148.8,96 149.8,96 150.8,96 151.8,96 122.2,107.9 123.5,107.9 124.7,107.9 132.8,107.9 134.1,107.9 135.3,107.9 143.7,107.9 145,107.9 146.2,107.9 112.8,119.9 113.8,119.9 114.8,119.9 115.8,119.9 116.8,119.9 117.8,119.9 118.8,119.9 119.8,119.9 120.8,119.9 121.8,119.9 122.8,119.9 123.8,119.9 124.8,119.9 125.8,119.9 126.8,119.9 127.8,119.9 128.8,119.9 129.8,119.9 130.8,119.9 131.8,119.9 132.8,119.9 133.8,119.9 134.8,119.9 135.8,119.9 136.8,119.9 137.8,119.9 138.8,119.9 139.8,119.9 140.8,119.9 141.8,119.9 142.8,119.9 143.8,119.9 144.8,119.9 145.8,119.9 146.8,119.9 147.8,119.9 152.8,119.9 153.8,119.9 154.8,119.9 155.8,119.9 156.8,119.9 148.8,120.1 149.8,120.1 150.8,120.1 151.8,120.1
AVCC: C9.1 FB1.2 U1.16 | length 2.3
  Top Layer w0.2: FB1.2 93.74,96.1 C9.1@93.74,97.1 ; C9.1 C9.1@93.74,97.1 ; U1.16 C9.1@93.74,97.1
B1: CN3.2 J2_U_rel_ladder2.1 J2_U_rel_ladder2.2 K1_U_rel_ladder2.3 K1_U_rel_ladder2.7 R15_U_rel_ladder2.2 R16_U_rel_ladder2.2 TP1.1 | length 49.1
  Top Layer w0.3: K1_U_rel_ladder2.3 147.8,117.7 147.6,117.9 147.55,117.9 147.3,118.15 R16_U_rel_ladder2.2 ; R15_U_rel_ladder2.2@149.5,108.45 149.75,108.7 149.8,108.7 150,108.9 150,110.7 151.3,112 151.3,113.4 ; TP1.1 151.3,113.4 ; CN3.2 165.9,111.6 165.9,115.6 165.2,116.3 155.4,116.3 152.3,119.4 148.3,119.4 147.8,118.9 147.55,118.9 147.3,118.65 R16_U_rel_ladder2.2 ; R16_U_rel_ladder2.2 J2_U_rel_ladder2.1 J2_U_rel_ladder2.2 151.3,117.608 151.3,113.4
B2: CN1.2 J2_U_rel_ladder1.1 J2_U_rel_ladder1.2 K1_U_rel_ladder1.3 K1_U_rel_ladder1.7 R15_U_rel_ladder1.2 R16_U_rel_ladder1.2 TP2.1 | length 48.4
  Top Layer w0.3: K1_U_rel_ladder1.3 147.8,93.6 147.6,93.8 147.55,93.8 147.3,94.05 R16_U_rel_ladder1.2 ; R15_U_rel_ladder1.2 149.5,84.35 149.75,84.6 149.8,84.6 150,84.8 K1_U_rel_ladder1.7 150,86.6 151.3,87.9 151.3,89.2 ; 152.912,94.488 152.1,95.3 148.3,95.3 147.8,94.8 147.55,94.8 147.3,94.55 R16_U_rel_ladder1.2 ; 152.913,94.487 ccw(c153.124,94.7) 153.124,94.4 165.1,94.4 165.9,93.6 165.9,89.8 CN1.2 ; TP2.1 151.3,89.2 ; R16_U_rel_ladder1.2 J2_U_rel_ladder1.2 151.3,93.508 151.3,89.2
C1: CN4.1 K8_U_rel_ladder2.4 R2_U_rel_ladder2.1 | length 13.1
  Top Layer w0.3: R2_U_rel_ladder2.1 K8_U_rel_ladder2.4 155,99.7 159.7,104.4 163.5,104.4 CN4.1
C2: CN2.1 K8_U_rel_ladder1.4 R2_U_rel_ladder1.1 | length 13.8
  Top Layer w0.3: R2_U_rel_ladder1.1 K8_U_rel_ladder1.4 155,75.6 161.78,82.38 163.48,82.38 CN2.1
GND: C1.1 C2.2 C3.1 C4.2 C5.2 C6.2 C7.2 C8.2 C9.2 C10.2 C11.2 LD1.2 MCP1.6 MCP1.11 MCP1.12 MCP1.13 P1.1 P1.4 P2.1 P2.4 P3.1 P3.3 P3.5 P3.7 P3.9 P3.11 P4.1 P4.3 P4.5 P4.7 P4.9 P4.11 U1.4 U1.18 U1.29 ULN1.8 ULN1.21 ULN2.8 ULN2.21 | length 38.8
  Top Layer w0.2: v1(90.2,81.1) C6.2 91,80.296 91.16,80.136 C7.2 v1(90.5,80.1) ; LD1.2 91.27,84.88 91.27,85.77 C5.2 v1(91.9,85.8) ; v1(92.2,97.2) C9.2 ; v1(94.2,76.2) 94.2,76.195 P4.1 P4.11 102,76.195 v1(102,76.2) ; v1(94.2,112.9) 94.2,112.895 P3.1 P3.3 P3.5 P3.7 P3.9 P3.11 102,112.895 v1(102,112.9) ; U1.18 U1.29 U1.4 ; v1(100.7,95.1) 100.748,95.148 100.748,95.381 100.779,95.413 100.779,95.699 C8.2 ; v1(102.5,92.4) C3.1 ; v1(103.1,94.9) MCP1.13 MCP1.12 ; v1(103.1,96.2) MCP1.11 MCP1.12 ; v1(103.106,95.541) 103.116,95.531 103.956,95.531 MCP1.12 ; v1(104.6,100) C1.1 105.381,99.879 105.381,98.944 MCP1.6 ; v1(107.7,104.3) 107.73,104.33 107.73,104.97 C2.2 107.865,105.105 107.865,105.965 ULN2.8 ULN2.21 ; v1(107.8,80.2) 107.78,80.22 107.78,80.88 C4.2 107.865,81.005 107.865,81.865 ULN1.8 ULN1.21
  other v1: 99.352,83.883 98.1,83.9 100.7,83.9 96.8,83.92 99.352,109.383 95.512,109.396 98.1,109.4 100.7,109.4 96.8,109.42
  other v2: 107.325,83.15 108.425,83.15 107.325,84.25 108.425,84.25 107.325,107.25 108.425,107.25 107.325,108.35 108.425,108.35
  other v5: 96.275,95.6 97.475,95.6 96.275,96.8 97.475,96.8
INT: P3.12 P4.12 R18.1 R20.2 | length 41.3
  Top Layer w0.2: R20.2 v1(100.7,90.4) ; R18.1 100.89,97.11 100.89,97.99 v1(100.9,98) ; P4.12 v1(101.275,81.7) ; v1(101.275,115.01) P3.12
  Bottom Layer w0.2: v1(100.7,90.4) 101.275,90.4 ; v1(100.9,98) 101.275,98 ; v1(101.275,81.7) 101.275,90.4 ; v1(101.275,115.01) 101.275,98 ; 101.275,90.4 101.275,98
MISO: J1.2 P3.2 P4.2 | length 36.8
  Top Layer w0.2: v1(94.9,83.395) 94.9,82.492 J1.2 94.925,82.4 P4.2 ; v1(94.925,115.01) P3.2
  Bottom Layer w0.2: v1(94.9,83.395) 94.913,83.408 94.913,114.998 v1(94.925,115.01) v1@94.9,115.01
MISO_T88: J1.1 P4.4 U1.14 | length 20.6
  Top Layer w0.2: v1(95.4,99) 95.4,98.932 95.525,98.807 U1.14 ; P4.4 96.195,82.4 J1.1 96.2,82.592 v1(96.2,83.395)
  Bottom Layer w0.2: v1@95.448,98.81 95.448,98.952 v1(95.4,99) 95.4,84.195 v1(96.2,83.395)
MOSI_T88: P3.4 R24.1 | length 16.5
  Top Layer w0.2: R24.1 96.142,100.282 v1(96.142,101.042) ; v1(96.195,115.01) P3.4
  Bottom Layer w0.2: v1(96.142,101.042) 96.147,101.048 96.147,114.963 v1(96.195,115.01)
NetC3_2: C3.2 MCP1.14 R17.2 | length 2.7
  Top Layer w0.2: MCP1.14 103.994,94.25 104.04,94.204 C3.2 R17.2
NetK1_U_rel_ladder1_4: K1_U_rel_ladder1.4 K2_U_rel_ladder1.3 R14_U_rel_ladder1.2 R16_U_rel_ladder1.1 | length 13.2
  Top Layer w0.3: K2_U_rel_ladder1.3 137.1,93.6 136.9,93.8 136.85,93.8 136.6,94.05 R14_U_rel_ladder1.2 R16_U_rel_ladder1.1 K1_U_rel_ladder1.4
NetK1_U_rel_ladder1_6: K1_U_rel_ladder1.6 K2_U_rel_ladder1.7 R13_U_rel_ladder1.2 R15_U_rel_ladder1.1 | length 13
  Top Layer w0.3: R13_U_rel_ladder1.2 138.8,84.35 139.05,84.6 R13_U_rel_ladder1.2@139.1,84.6 ; K2_U_rel_ladder1.7 139.3,84.8 R13_U_rel_ladder1.2@139.1,84.6 ; R15_U_rel_ladder1.1 R15_U_rel_ladder1.1@147.8,84.35 ; K1_U_rel_ladder1.6 R15_U_rel_ladder1.1@147.8,84.35 ; R13_U_rel_ladder1.2@139.1,84.6 147.55,84.6 R15_U_rel_ladder1.1@147.8,84.35
NetK1_U_rel_ladder1_8: K1_U_rel_ladder1.8 ULN1.17 | length 46.8
  Top Layer w0.2: ULN1.17 v1(108.375,86.425)
  Top Layer w0.3: v1(152.3,86.1) K1_U_rel_ladder1.8
  Mid Layer 2 w0.2: v1(108.375,86.425) 110.325,86.425 111.5,87.6 150.8,87.6 v1(152.3,86.1)
NetK1_U_rel_ladder2_4: K1_U_rel_ladder2.4 K2_U_rel_ladder2.3 R14_U_rel_ladder2.2 R16_U_rel_ladder2.1 | length 13.2
  Top Layer w0.3: K2_U_rel_ladder2.3 137.1,117.7 136.9,117.9 136.85,117.9 136.6,118.15 R14_U_rel_ladder2.2 R16_U_rel_ladder2.1 K1_U_rel_ladder2.4
NetK1_U_rel_ladder2_6: K1_U_rel_ladder2.6 K2_U_rel_ladder2.7 R13_U_rel_ladder2.2 R15_U_rel_ladder2.1 | length 13
  Top Layer w0.3: R13_U_rel_ladder2.2 138.8,108.45 139.05,108.7 R13_U_rel_ladder2.2@139.1,108.7 ; K2_U_rel_ladder2.7 139.3,108.9 R13_U_rel_ladder2.2@139.1,108.7 ; R15_U_rel_ladder2.1 R15_U_rel_ladder2.1@147.8,108.45 ; K1_U_rel_ladder2.6 R15_U_rel_ladder2.1@147.8,108.45 ; R13_U_rel_ladder2.2@139.1,108.7 147.55,108.7 R15_U_rel_ladder2.1@147.8,108.45
NetK1_U_rel_ladder2_8: K1_U_rel_ladder2.8 ULN2.17 | length 46.8
  Top Layer w0.2: ULN2.17 v1(108.375,110.525)
  Top Layer w0.3: v1(152.3,110.2) K1_U_rel_ladder2.8
  Mid Layer 2 w0.2: v1(108.375,110.525) 110.325,110.525 111.5,111.7 150.8,111.7 v1(152.3,110.2)
NetK2_U_rel_ladder1_4: K2_U_rel_ladder1.4 K3_U_rel_ladder1.3 R12_U_rel_ladder1.2 R14_U_rel_ladder1.1 | length 13.2
  Top Layer w0.3: K3_U_rel_ladder1.3 126.4,93.6 126.2,93.8 126.15,93.8 125.9,94.05 R12_U_rel_ladder1.2 R14_U_rel_ladder1.1 K2_U_rel_ladder1.4
NetK2_U_rel_ladder1_6: K2_U_rel_ladder1.6 K3_U_rel_ladder1.7 R11_U_rel_ladder1.2 R13_U_rel_ladder1.1 | length 13.3
  Top Layer w0.3: R11_U_rel_ladder1.2 128.1,84.35 128.35,84.6 R11_U_rel_ladder1.2@128.4,84.6 ; K3_U_rel_ladder1.7 128.6,84.8 R11_U_rel_ladder1.2@128.4,84.6 ; K2_U_rel_ladder1.6 R13_U_rel_ladder1.1@137.1,84.35 ; R11_U_rel_ladder1.2@128.4,84.6 136.85,84.6 R13_U_rel_ladder1.1@137.1,84.35 ; R13_U_rel_ladder1.1@137.1,84.35 R13_U_rel_ladder1.1 R13_U_rel_ladder1.1@137.1,84.35
NetK2_U_rel_ladder1_8: K2_U_rel_ladder1.8 ULN1.16 | length 35.2
  Top Layer w0.2: ULN1.16 v1(109.775,85.525)
  Top Layer w0.3: v1(141.6,86.1) K2_U_rel_ladder1.8
  Mid Layer 2 w0.2: v1(109.775,85.525) 110.425,85.525 112.098,87.198 140.902,87.198 142,86.1
NetK2_U_rel_ladder2_4: K2_U_rel_ladder2.4 K3_U_rel_ladder2.3 R12_U_rel_ladder2.2 R14_U_rel_ladder2.1 | length 13.2
  Top Layer w0.3: K3_U_rel_ladder2.3 126.4,117.7 126.2,117.9 126.15,117.9 125.9,118.15 R12_U_rel_ladder2.2 R14_U_rel_ladder2.1 K2_U_rel_ladder2.4
NetK2_U_rel_ladder2_6: K2_U_rel_ladder2.6 K3_U_rel_ladder2.7 R11_U_rel_ladder2.2 R13_U_rel_ladder2.1 | length 13
  Top Layer w0.3: R11_U_rel_ladder2.2 128.1,108.45 128.35,108.7 R11_U_rel_ladder2.2@128.4,108.7 ; K3_U_rel_ladder2.7 128.6,108.9 R11_U_rel_ladder2.2@128.4,108.7 ; R13_U_rel_ladder2.1 R13_U_rel_ladder2.1@137.1,108.45 ; K2_U_rel_ladder2.6 R13_U_rel_ladder2.1@137.1,108.45 ; R11_U_rel_ladder2.2@128.4,108.7 136.85,108.7 R13_U_rel_ladder2.1@137.1,108.45
NetK2_U_rel_ladder2_8: K2_U_rel_ladder2.8 ULN2.16 | length 34.9
  Top Layer w0.2: ULN2.16 v1(109.775,109.625)
  Top Layer w0.3: v1(141.6,110.2) K2_U_rel_ladder2.8
  Mid Layer 2 w0.2: v1(109.775,109.625) 110.425,109.625 112.098,111.298 140.502,111.298 v1@141.684,110.116
NetK3_U_rel_ladder1_4: K3_U_rel_ladder1.4 K4_U_rel_ladder1.3 R10_U_rel_ladder1.2 R12_U_rel_ladder1.1 | length 13.2
  Top Layer w0.3: K4_U_rel_ladder1.3 115.7,93.6 115.5,93.8 115.45,93.8 115.2,94.05 R10_U_rel_ladder1.2 R12_U_rel_ladder1.1 K3_U_rel_ladder1.4
NetK3_U_rel_ladder1_6: K3_U_rel_ladder1.6 K4_U_rel_ladder1.7 R9_U_rel_ladder1.2 R11_U_rel_ladder1.1 | length 13.7
  Top Layer w0.3: R9_U_rel_ladder1.2 R9_U_rel_ladder1.2@117.4,84.25 ; R9_U_rel_ladder1.2@117.65,84.5 R9_U_rel_ladder1.2@117.4,84.25 ; K4_U_rel_ladder1.7 117.9,84.8 R9_U_rel_ladder1.2@117.7,84.6 ; R11_U_rel_ladder1.1@126.15,84.5 R11_U_rel_ladder1.1@126.4,84.25 ; R11_U_rel_ladder1.1 R11_U_rel_ladder1.1@126.4,84.25 ; K3_U_rel_ladder1.6 R11_U_rel_ladder1.1@126.4,84.35 ; R9_U_rel_ladder1.2@117.4,84.25 117.4,84.35 117.65,84.6 R9_U_rel_ladder1.2@117.7,84.6 ; R9_U_rel_ladder1.2@117.7,84.6 126.15,84.6 R11_U_rel_ladder1.1@126.4,84.35 ; R11_U_rel_ladder1.1@126.4,84.25 R11_U_rel_ladder1.1@126.4,84.35
NetK3_U_rel_ladder1_8: K3_U_rel_ladder1.8 ULN1.15 | length 23.4
  Top Layer w0.2: ULN1.15 v1(110.6,84.7)
  Top Layer w0.3: v1(130.9,86.1) K3_U_rel_ladder1.8
  Mid Layer 2 w0.2: v1(110.6,84.7) 112.7,86.8 130.2,86.8 v1@130.999,86.001
NetK3_U_rel_ladder2_4: K3_U_rel_ladder2.4 K4_U_rel_ladder2.3 R10_U_rel_ladder2.2 R12_U_rel_ladder2.1 | length 13.2
  Top Layer w0.3: K4_U_rel_ladder2.3 115.7,117.7 115.5,117.9 115.45,117.9 115.2,118.15 R10_U_rel_ladder2.2 R12_U_rel_ladder2.1 K3_U_rel_ladder2.4
NetK3_U_rel_ladder2_6: K3_U_rel_ladder2.6 K4_U_rel_ladder2.7 R9_U_rel_ladder2.2 R11_U_rel_ladder2.1 | length 13
  Top Layer w0.3: R9_U_rel_ladder2.2 117.4,108.45 117.65,108.7 R9_U_rel_ladder2.2@117.7,108.7 ; K4_U_rel_ladder2.7 117.9,108.9 R9_U_rel_ladder2.2@117.7,108.7 ; R11_U_rel_ladder2.1 R11_U_rel_ladder2.1@126.4,108.45 ; K3_U_rel_ladder2.6 R11_U_rel_ladder2.1@126.4,108.45 ; R9_U_rel_ladder2.2@117.7,108.7 126.15,108.7 R11_U_rel_ladder2.1@126.4,108.45
NetK3_U_rel_ladder2_8: K3_U_rel_ladder2.8 ULN2.15 | length 23.3
  Top Layer w0.2: ULN2.15 v1(110.6,108.8)
  Top Layer w0.3: v1(130.9,110.2) K3_U_rel_ladder2.8
  Mid Layer 2 w0.2: v1(110.6,108.8) 112.7,110.9 130.2,110.9 v1@130.951,110.149
NetK4_U_rel_ladder1_4: K4_U_rel_ladder1.4 K5_U_rel_ladder1.3 R8_U_rel_ladder1.2 R10_U_rel_ladder1.1 | length 27.7
  Top Layer w0.3: R10_U_rel_ladder1.1 K4_U_rel_ladder1.4 113.5,91.8 112.4,90.7 112.4,80.8 115.6,77.6 119.7,77.6 120.7,76.6 K5_U_rel_ladder1.3 120.7,73.8 120.9,73.6 120.95,73.6 121.2,73.35 R8_U_rel_ladder1.2
NetK4_U_rel_ladder1_6: K4_U_rel_ladder1.6 K5_U_rel_ladder1.7 R7_U_rel_ladder1.2 R9_U_rel_ladder1.1 | length 7.9
  Top Layer w0.3: K4_U_rel_ladder1.6 R9_U_rel_ladder1.1 115.7,83.85 116.75,82.8 R7_U_rel_ladder1.2@118.7,82.8 ; K5_U_rel_ladder1.7 118.5,82.6 R7_U_rel_ladder1.2@118.7,82.8 ; R7_U_rel_ladder1.2 119,83.05 118.75,82.8 R7_U_rel_ladder1.2@118.7,82.8
NetK4_U_rel_ladder1_8: K4_U_rel_ladder1.8 ULN1.14 | length 12.2
  Top Layer w0.2: ULN1.14 v1(111.1,84.2)
  Top Layer w0.3: v1(120.2,86.1) K4_U_rel_ladder1.8
  Mid Layer 2 w0.2: v1(111.1,84.2) 113,86.1 v1(120.2,86.1)
NetK4_U_rel_ladder2_4: K4_U_rel_ladder2.4 K5_U_rel_ladder2.3 R8_U_rel_ladder2.2 R10_U_rel_ladder2.1 | length 28.5
  Top Layer w0.3: R10_U_rel_ladder2.1 K4_U_rel_ladder2.4 113.5,115.9 112.4,114.8 112.4,103.9 114.3,102 119.8,102 120.7,101.1 K5_U_rel_ladder2.3 120.7,97.976 120.876,97.8 120.95,97.8 121.2,97.55 R8_U_rel_ladder2.2
NetK4_U_rel_ladder2_6: K4_U_rel_ladder2.6 K5_U_rel_ladder2.7 R7_U_rel_ladder2.2 R9_U_rel_ladder2.1 | length 8.1
  Top Layer w0.3: K4_U_rel_ladder2.6 R9_U_rel_ladder2.1 115.7,107.95 117.55,106.1 118.3,106.1 K5_U_rel_ladder2.7@118.5,105.9 ; K5_U_rel_ladder2.7 K5_U_rel_ladder2.7@118.5,105.9 ; R7_U_rel_ladder2.2 119,107.15 118.75,106.9 118.7,106.9 118.5,106.7 K5_U_rel_ladder2.7@118.5,105.9
NetK4_U_rel_ladder2_8: K4_U_rel_ladder2.8 ULN2.14 | length 13.4
  Top Layer w0.2: ULN2.14 v1(111.1,108.3)
  Top Layer w0.3: v1(120.2,110.2) K4_U_rel_ladder2.8
  Mid Layer 2 w0.2: v1(111.1,108.3) 113,110.2 121.4,110.2
NetK5_U_rel_ladder1_4: K5_U_rel_ladder1.4 K6_U_rel_ladder1.3 R6_U_rel_ladder1.2 R8_U_rel_ladder1.1 | length 13.3
  Top Layer w0.3: K5_U_rel_ladder1.4 R8_U_rel_ladder1.1 R6_U_rel_ladder1.2 132,73.35 131.75,73.6 131.7,73.6 131.5,73.8 K6_U_rel_ladder1.3
NetK5_U_rel_ladder1_6: K5_U_rel_ladder1.6 K6_U_rel_ladder1.7 R5_U_rel_ladder1.2 R7_U_rel_ladder1.1 | length 13.1
  Top Layer w0.3: K5_U_rel_ladder1.6 R7_U_rel_ladder1.1@120.7,83.05 ; R7_U_rel_ladder1.1 R7_U_rel_ladder1.1@120.7,83.05 ; K6_U_rel_ladder1.7 129.3,82.6 R5_U_rel_ladder1.2@129.5,82.8 ; R5_U_rel_ladder1.2 129.8,83.05 129.55,82.8 R5_U_rel_ladder1.2@129.5,82.8 ; R7_U_rel_ladder1.1@120.7,83.05 120.95,82.8 R5_U_rel_ladder1.2@129.5,82.8
NetK5_U_rel_ladder1_8: K5_U_rel_ladder1.8 ULN1.13 | length 6.6
  Top Layer w0.2: ULN1.13 v1(110.6,83.7)
  Top Layer w0.3: v1(114.4,81.3) K5_U_rel_ladder1.8
  Mid Layer 2 w0.2: v1(110.6,83.7) 111.6,83.7 114,81.3 v1(114.4,81.3)
NetK5_U_rel_ladder2_4: K5_U_rel_ladder2.4 K6_U_rel_ladder2.3 R6_U_rel_ladder2.2 R8_U_rel_ladder2.1 | length 13.2
  Top Layer w0.3: K5_U_rel_ladder2.4 R8_U_rel_ladder2.1 131.8,97.3 R6_U_rel_ladder2.2 131.9,97.45 131.65,97.7 131.6,97.7 131.4,97.9 K6_U_rel_ladder2.3
NetK5_U_rel_ladder2_6: K5_U_rel_ladder2.6 K6_U_rel_ladder2.7 R5_U_rel_ladder2.2 R7_U_rel_ladder2.1 | length 13
  Top Layer w0.3: K5_U_rel_ladder2.6 R7_U_rel_ladder2.1@120.7,107.15 ; R7_U_rel_ladder2.1 R7_U_rel_ladder2.1@120.7,107.15 ; K6_U_rel_ladder2.7 129.2,106.7 R5_U_rel_ladder2.2@129.4,106.9 ; R5_U_rel_ladder2.2 129.7,107.15 129.45,106.9 R5_U_rel_ladder2.2@129.4,106.9 ; R7_U_rel_ladder2.1@120.7,107.15 120.95,106.9 R5_U_rel_ladder2.2@129.4,106.9
NetK5_U_rel_ladder2_8: K5_U_rel_ladder2.8 ULN2.13 | length 7.8
  Top Layer w0.2: ULN2.13 v1(110.6,107.8)
  Top Layer w0.3: v1(114.4,105.4) K5_U_rel_ladder2.8
  Mid Layer 2 w0.2: v1(110.6,107.8) 111.6,107.8 114,105.4 115.6,105.4
NetK6_U_rel_ladder1_4: K6_U_rel_ladder1.4 K7_U_rel_ladder1.3 R4_U_rel_ladder1.2 R6_U_rel_ladder1.1 | length 13.2
  Top Layer w0.3: K6_U_rel_ladder1.4 R6_U_rel_ladder1.1 R4_U_rel_ladder1.2 142.7,73.35 142.45,73.6 142.4,73.6 142.2,73.8 K7_U_rel_ladder1.3
NetK6_U_rel_ladder1_6: K6_U_rel_ladder1.6 K7_U_rel_ladder1.7 R3_U_rel_ladder1.2 R5_U_rel_ladder1.1 | length 13.3
  Top Layer w0.3: K6_U_rel_ladder1.6 R5_U_rel_ladder1.1 131.5,83.05 131.75,82.8 R3_U_rel_ladder1.2@140.2,82.8 ; K7_U_rel_ladder1.7 140,82.6 R3_U_rel_ladder1.2@140.2,82.8 ; R3_U_rel_ladder1.2 140.5,83.05 140.25,82.8 R3_U_rel_ladder1.2@140.2,82.8
NetK6_U_rel_ladder1_8: K6_U_rel_ladder1.8 ULN1.12 | length 17.8
  Top Layer w0.2: ULN1.12 v1(111.1,83.2)
  Top Layer w0.3: v1(125.2,81.3) K6_U_rel_ladder1.8
  Mid Layer 2 w0.2: v1(111.1,83.2) 113.8,80.5 124.4,80.5 v1@125.178,81.278
NetK6_U_rel_ladder2_4: K6_U_rel_ladder2.4 K7_U_rel_ladder2.3 R4_U_rel_ladder2.2 R6_U_rel_ladder2.1 | length 13.2
  Top Layer w0.3: K6_U_rel_ladder2.4 R6_U_rel_ladder2.1 R4_U_rel_ladder2.2 142.6,97.45 142.35,97.7 142.3,97.7 142.1,97.9 K7_U_rel_ladder2.3
NetK6_U_rel_ladder2_6: K6_U_rel_ladder2.6 K7_U_rel_ladder2.7 R3_U_rel_ladder2.2 R5_U_rel_ladder2.1 | length 13
  Top Layer w0.3: K6_U_rel_ladder2.6 R5_U_rel_ladder2.1@131.4,107.15 ; R5_U_rel_ladder2.1 R5_U_rel_ladder2.1@131.4,107.15 ; K7_U_rel_ladder2.7 139.9,106.7 R3_U_rel_ladder2.2@140.1,106.9 ; R3_U_rel_ladder2.2 140.4,107.15 140.15,106.9 R3_U_rel_ladder2.2@140.1,106.9 ; R5_U_rel_ladder2.1@131.4,107.15 131.65,106.9 R3_U_rel_ladder2.2@140.1,106.9
NetK6_U_rel_ladder2_8: K6_U_rel_ladder2.8 ULN2.12 | length 17.9
  Top Layer w0.2: ULN2.12 v1(111.1,107.3)
  Top Layer w0.3: v1(125.1,105.4) K6_U_rel_ladder2.8
  Mid Layer 2 w0.2: v1(111.1,107.3) 113.8,104.6 124.3,104.6 v1@125.189,105.489
NetK7_U_rel_ladder1_4: K7_U_rel_ladder1.4 K8_U_rel_ladder1.3 R2_U_rel_ladder1.2 R4_U_rel_ladder1.1 | length 13.1
  Top Layer w0.3: K7_U_rel_ladder1.4 R4_U_rel_ladder1.1 R2_U_rel_ladder1.2 153.3,73.35 153.05,73.6 153,73.6 152.8,73.8 K8_U_rel_ladder1.3
NetK7_U_rel_ladder1_6: K7_U_rel_ladder1.6 K8_U_rel_ladder1.7 R1_U_rel_ladder1.2 R3_U_rel_ladder1.1 | length 12.9
  Top Layer w0.3: K7_U_rel_ladder1.6 R3_U_rel_ladder1.1@142.2,83.05 ; R3_U_rel_ladder1.1 R3_U_rel_ladder1.1@142.2,83.05 ; K8_U_rel_ladder1.7 150.6,82.6 R1_U_rel_ladder1.2@150.8,82.8 ; R1_U_rel_ladder1.2 151.1,83.05 150.85,82.8 R1_U_rel_ladder1.2@150.8,82.8 ; R3_U_rel_ladder1.1@142.2,83.05 142.45,82.8 150.6,82.8 R1_U_rel_ladder1.2@150.8,82.8
NetK7_U_rel_ladder1_8: K7_U_rel_ladder1.8 ULN1.11 | length 28.7
  Top Layer w0.2: ULN1.11 v1(110.6,82.7)
  Top Layer w0.3: v1(135.9,81.3) K7_U_rel_ladder1.8
  Mid Layer 2 w0.2: v1(110.6,82.7) 113.2,80.1 134.7,80.1 v1@135.884,81.284
NetK7_U_rel_ladder2_4: K7_U_rel_ladder2.4 K8_U_rel_ladder2.3 R2_U_rel_ladder2.2 R4_U_rel_ladder2.1 | length 13.2
  Top Layer w0.3: K7_U_rel_ladder2.4 R4_U_rel_ladder2.1 R2_U_rel_ladder2.2 153.3,97.45 153.05,97.7 153,97.7 152.8,97.9 K8_U_rel_ladder2.3
NetK7_U_rel_ladder2_6: K7_U_rel_ladder2.6 K8_U_rel_ladder2.7 R1_U_rel_ladder2.2 R3_U_rel_ladder2.1 | length 13
  Top Layer w0.3: K7_U_rel_ladder2.6 R3_U_rel_ladder2.1@142.1,107.15 ; R3_U_rel_ladder2.1 R3_U_rel_ladder2.1@142.1,107.15 ; K8_U_rel_ladder2.7 150.6,106.7 R1_U_rel_ladder2.2@150.8,106.9 ; R1_U_rel_ladder2.2 151.1,107.15 150.85,106.9 R1_U_rel_ladder2.2@150.8,106.9 ; R3_U_rel_ladder2.1@142.1,107.15 142.35,106.9 150.6,106.9 R1_U_rel_ladder2.2@150.8,106.9
NetK7_U_rel_ladder2_8: K7_U_rel_ladder2.8 ULN2.11 | length 28.6
  Top Layer w0.2: ULN2.11 v1(110.6,106.8)
  Top Layer w0.3: v1(135.8,105.4) K7_U_rel_ladder2.8
  Mid Layer 2 w0.2: v1(110.6,106.8) 113.2,104.2 134.6,104.2 v1@135.837,105.437
NetK8_U_rel_ladder1_8: K8_U_rel_ladder1.8 ULN1.10 | length 40.1
  Top Layer w0.2: ULN1.10 v1(109.775,81.875)
  Top Layer w0.3: v1(146.5,81.3) K8_U_rel_ladder1.8
  Mid Layer 2 w0.2: v1(109.775,81.875) 110.425,81.875 112.6,79.7 144.9,79.7 v1(146.5,81.3)
NetK8_U_rel_ladder2_8: K8_U_rel_ladder2.8 ULN2.10 | length 40.1
  Top Layer w0.2: ULN2.10 v1(109.775,105.975)
  Top Layer w0.3: v1(146.5,105.4) K8_U_rel_ladder2.8
  Mid Layer 2 w0.2: v1(109.775,105.975) 110.425,105.975 112.6,103.8 144.9,103.8 v1(146.5,105.4)
NetMCP1_1: MCP1.1 ULN2.2 | length 11.6
  Top Layer w0.2: ULN2.2 105.75,108.3 104.82,107.37 104.82,104.38 108.631,100.569 108.631,98.944 MCP1.1
NetMCP1_2: MCP1.2 ULN2.1 | length 12.1
  Top Layer w0.2: ULN2.1 105.75,108.8 104.519,107.569 104.519,104.147 107.981,100.685 107.981,98.944 MCP1.2
NetMCP1_3: MCP1.3 ULN2.20 | length 13.6
  Top Layer w0.2: ULN2.20 106.875,109.448 106.852,109.425 105.913,109.425 104.217,107.729 104.217,103.883 107.35,100.75 MCP1.3
NetMCP1_4: MCP1.4 ULN2.19 | length 15.2
  Top Layer w0.2: MCP1.4 106.7,100.9 103.915,103.685 103.915,107.915 106.3,110.3 107.242,110.3 107.359,110.183 107.359,109.977 107.365,109.97 107.365,109.635 ULN2.19
NetMCP1_17: MCP1.17 ULN1.6 | length 13.9
  Top Layer w0.2: MCP1.17 106.05,90.425 104.194,88.569 104.194,83.795 106.088,81.9 106.852,81.9 106.875,81.877 ULN1.6
NetMCP1_18: MCP1.18 ULN1.5 | length 12.5
  Top Layer w0.2: ULN1.5 105.75,82.7 104.495,83.955 104.495,88.22 106.7,90.425 MCP1.18
NetMCP1_19: MCP1.19 ULN1.4 | length 12
  Top Layer w0.2: ULN1.4 105.75,83.2 104.797,84.153 104.797,87.872 107.35,90.425 MCP1.19
NetMCP1_20: MCP1.20 ULN1.3 | length 11.5
  Top Layer w0.2: ULN1.3 105.75,83.7 105.098,84.352 105.098,87.523 108,90.425 MCP1.20
NetMCP1_21: MCP1.21 ULN1.2 | length 11.1
  Top Layer w0.2: ULN1.2 106.04,84.21 105.667,84.21 105.4,84.477 105.4,87.1 108.631,90.331 108.631,93.456 MCP1.21
NetMCP1_22: MCP1.22 ULN1.1 | length 11
  Top Layer w0.2: ULN1.1 106.077,84.7 106.1,84.723 106.1,87 109.425,90.325 MCP1.22
NetMCP1_23: MCP1.23 ULN1.20 | length 11.5
  Top Layer w0.2: ULN1.20 106.875,86.975 110.2,90.3 110.2,94.783 110.083,94.9 MCP1.23
NetMCP1_24: MCP1.24 ULN1.19 | length 12.6
  Top Layer w0.2: ULN1.19 107.375,86.675 110.8,90.1 110.8,95.2 110.45,95.55 MCP1.24
NetMCP1_25: MCP1.25 ULN2.6 | length 12.6
  Top Layer w0.2: ULN2.6 106.875,104.325 111,100.2 111,96.911 110.289,96.2 MCP1.25
NetMCP1_26: MCP1.26 ULN2.5 | length 12.8
  Top Layer w0.2: ULN2.5 106.05,104.65 107.973,102.727 110.698,100.002 110.698,97.398 110.15,96.85 MCP1.26
NetMCP1_27: MCP1.27 ULN2.4 | length 13
  Top Layer w0.2: ULN2.4 105.75,107.3 105.423,106.973 105.423,104.777 110.397,99.803 110.397,97.898 110.018,97.519 109.444,97.519 MCP1.27
NetMCP1_28: MCP1.28 ULN2.3 | length 12
  Top Layer w0.2: ULN2.3 105.75,107.8 105.122,107.172 105.122,104.578 109.425,100.275 MCP1.28
NetR18_2: R18.2 U1.6 | length 1.1
  Top Layer w0.2: U1.6 R18.2
NetR23_2: R23.2 U1.12 | length 1.3
  Top Layer w0.2: U1.12 96.425,98.905 96.88,99.36 R23.2
NetR24_2: R24.2 U1.13 | length 1.2
  Top Layer w0.2: U1.13 95.975,99.235 R24.2
NetR25_2: R25.2 U1.15 | length 1.3
  Top Layer w0.2: R25.2 93.881,97.859 93.881,97.807 94.139,97.55 U1.15
R\E\S\E\T\: P3.10 P4.10 R19.2 U1.25 | length 42.7
  Top Layer w0.2: U1.25 96.875,93.452 97.127,93.2 v1(99.4,93.2) ; R19.2 v1(99.5,91.4) ; P4.10 v1(100.005,81.7) ; v1(100.005,115.01) P3.10
  Bottom Layer w0.2: v1(99.4,93.2) 100.005,93.2 ; v1(99.5,91.4) 100.005,91.4 ; v1(100.005,81.7) 100.005,91.4 ; v1(100.005,115.01) 100.005,93.2 ; 100.005,91.4 100.005,93.2
S\S\: P3.8 P4.8 R23.1 | length 38.6
  Top Layer w0.2: R23.1 96.92,100.22 98.28,100.22 v1(98.3,100.2) ; P4.8 v1(98.735,81.7) ; v1(98.735,115.01) P3.8
  Bottom Layer w0.2: v1(98.3,100.2) 98.735,100.2 ; v1(98.735,81.7) 98.735,100.2 ; v1(98.735,115.01) 98.735,100.2
SCK: P3.6 P4.6 R25.1 | length 45.2
  Top Layer w0.2: R25.1 92.9,98.04 92.9,101.1 93.7,101.9 v1(97,101.9) ; P4.6 v1(97.465,81.7) ; v1(97.465,115.01) P3.6
  Bottom Layer w0.2: v1(97,101.9) 97.465,101.9 ; v1(97.465,81.7) 97.465,93.935 96.918,94.482 96.918,97.718 97.465,98.265 97.465,101.9 ; v1(97.465,115.01) 97.465,101.9
SCL: MCP1.8 R22.2 U1.24 | length 14.4
  Top Layer w0.2: U1.24 96.425,93.475 97.198,92.702 100.902,92.702 102,93.8 v1(102,94.2) ; v1(102.9,99) 102.92,98.98 102.92,98.32 R22.2 103.071,98.169 103.956,98.169 MCP1.8
  Mid Layer 1 w0.2: v1(102,94.2) 102,96.5 102.9,97.4 v1(102.9,99)
SDA: MCP1.9 R21.2 U1.23 | length 13.3
  Top Layer w0.2: U1.23 95.975,93.425 97,92.4 101.2,92.4 102.5,93.7 102.5,96.239 102.94,96.679 R21.2 MCP1.9
pads on no net: K1_U_rel_ladder1.2 K1_U_rel_ladder1.5 K1_U_rel_ladder2.2 K1_U_rel_ladder2.5 K2_U_rel_ladder1.2 K2_U_rel_ladder1.5 K2_U_rel_ladder2.2 K2_U_rel_ladder2.5 K3_U_rel_ladder1.2 K3_U_rel_ladder1.5 K3_U_rel_ladder2.2 K3_U_rel_ladder2.5 K4_U_rel_ladder1.2 K4_U_rel_ladder1.5 K4_U_rel_ladder2.2 K4_U_rel_ladder2.5 K5_U_rel_ladder1.2 K5_U_rel_ladder1.5 K5_U_rel_ladder2.2 K5_U_rel_ladder2.5 K6_U_rel_ladder1.2 K6_U_rel_ladder1.5 K6_U_rel_ladder2.2 K6_U_rel_ladder2.5 K7_U_rel_ladder1.2 K7_U_rel_ladder1.5 K7_U_rel_ladder2.2 K7_U_rel_ladder2.5 K8_U_rel_ladder1.2 K8_U_rel_ladder1.5 K8_U_rel_ladder2.2 K8_U_rel_ladder2.5 LD1.4 MCP1.7 MCP1.10 MCP1.15 MCP1.16 MCP1.29 U1.1 U1.2 U1.5 U1.7 U1.8 U1.9 U1.10 U1.11 U1.17 U1.19 U1.20 U1.21 U1.22 U1.26 U1.27 U1.28 ULN1.7 ULN1.18 ULN2.7 ULN2.18
copper on no net:
  other v2: 105.6,95.1 106.7,95.1 107.8,95.1 105.6,96.2 106.7,96.2 107.8,96.2 105.6,97.3 106.7,97.3 107.8,97.3
  other v4: 89,71 164,71 89,121 164,121

## Polygon pours and split planes (outlines as drawn)
GND on Mid Layer 2 "NONET_L-01_P-001" (solid, remove dead copper, pour order 6): 85.8,123.8 85.8,68.3 111.5,68.3 111.5,123.8
AGND on Mid Layer 2 "NONET_L-01_P-001" (solid, remove dead copper, pour order 0): 167.4,123.8 167.4,68.2 112.4,68.2 112.4,123.8
GND on Bottom Layer "NONET_L-01_P-001" (solid, remove dead copper, pour order 7): 85.8,123.8 85.8,68.3 111.5,68.3 111.5,123.8
AGND on Bottom Layer "NONET_L-01_P-001" (solid, remove dead copper, pour order 1): 167.4,123.8 167.4,68.2 112.4,68.2 112.4,123.8
+3.3V on Mid Layer 1 "NONET_L-01_P-001" (solid, remove dead copper, pour order 5): 85.8,123.8 85.8,68.3 111.5,68.3 111.5,123.8
AGND on Mid Layer 1 "NONET_L-01_P-001" (solid, remove dead copper, pour order 2): 167.4,123.8 167.4,68.2 112.4,68.2 112.4,123.8
GND on Top Layer "NONET_L-01_P-001" (solid, remove dead copper, pour order 4): 85.8,124 85.8,68 111.5,68 111.5,124
AGND on Top Layer "NONET_L-01_P-001" (solid, remove dead copper, pour order 3): 167.4,124 167.4,68 112.4,68 112.4,124
no net on Top Overlay "NONET_L-01_P-001" (solid): 97,111.3 97,110.5 99.2,110.5 99.2,111.3
no net on Top Overlay "NONET_L-01_P-001" (solid): 97,74.6 97,73.8 99.2,73.8 99.2,74.6

## Other copper
Top Layer:
  text "By: / ElShiny" at 104.834,68.6 h1

## Silkscreen, mask and mechanical layers (free items; w line width, h text height)
Top Overlay:
  lines w0.2: 86.7,74.2 86.1,74.2 ; 94.1,74.6 102.4,74.6 ; 94.1,111.3 102.4,111.3 ; 86.1,74.2 88.6,74.2 88.6,87.2 88.6,89.8 86.1,89.8 86.1,85.4 86.1,74.2
  text "(c) Distopik Ltd." at 92.4,121 h1
  text "2023" at 97.7,119.3 h1
  text "A1" at 158.5,114.5 h1 r90
  text "V1.0" at 88.1,113.1 h1 r90
  text "DATA IN" at 104.3,111 h1 r90
  text "B1" at 158.5,109.4 h1 r90
  text "C1" at 158.5,104.4 h1 r90
  text "G +5 +12 G" at 90.4,101.3 h1 r90
  text "AGND" at 158.5,97.9 h1 r90
  text "G +5 +12 G" at 90.4,90.8 h1 r90
  text "A2" at 158.5,90.5 h1 r90
  text "B2" at 158.5,85.4 h1 r90
  text "C2" at 158.5,80.4 h1 r90
  text "UNIREL-POT MINI" at 88.1,74.8 h1 r90
  text "DATA OUT" at 104.1,74.2 h1 r90
  text "AGND" at 158.5,73.9 h1 r90
Mechanical 1:
  the board outline again, w0.2

## Text inside footprints (layer, text, board x,y; h text height)
C10: Top Overlay "+" at 94.4,108.8 h1.5 r90
C11: Top Overlay "+" at 93,85.9 h1.5 r270